# Altium PCB FPGA.PcbDoc (part 1 of 2)
Units mil, origin at the board's own origin, x right, y up, seen from the top; angles counter-clockwise.
Board outline 4158 x 2670 mil, 4 copper layers (Top Layer, Middle 1 Layer, Middle 2 Layer, Bottom Layer), stack 51.864 mil thick; 135 components, 122 nets, 386 pads, 107 vias.
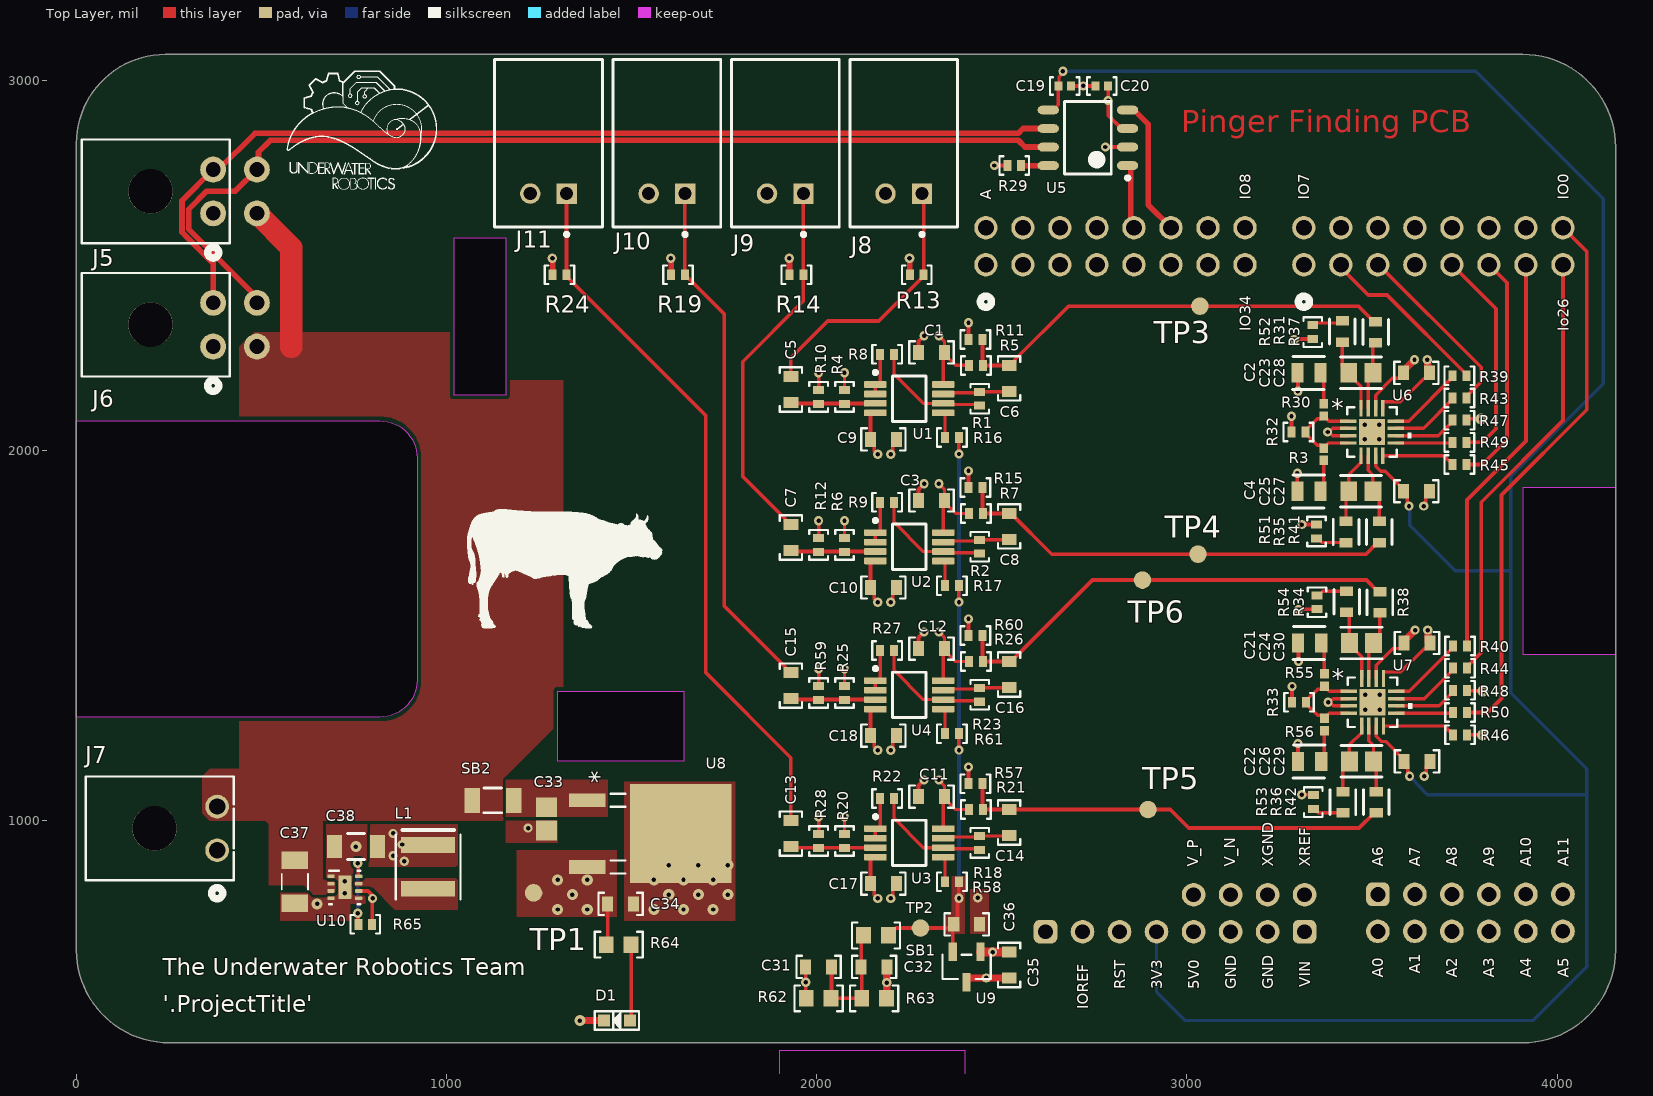
[diagram p0: Top Layer view]
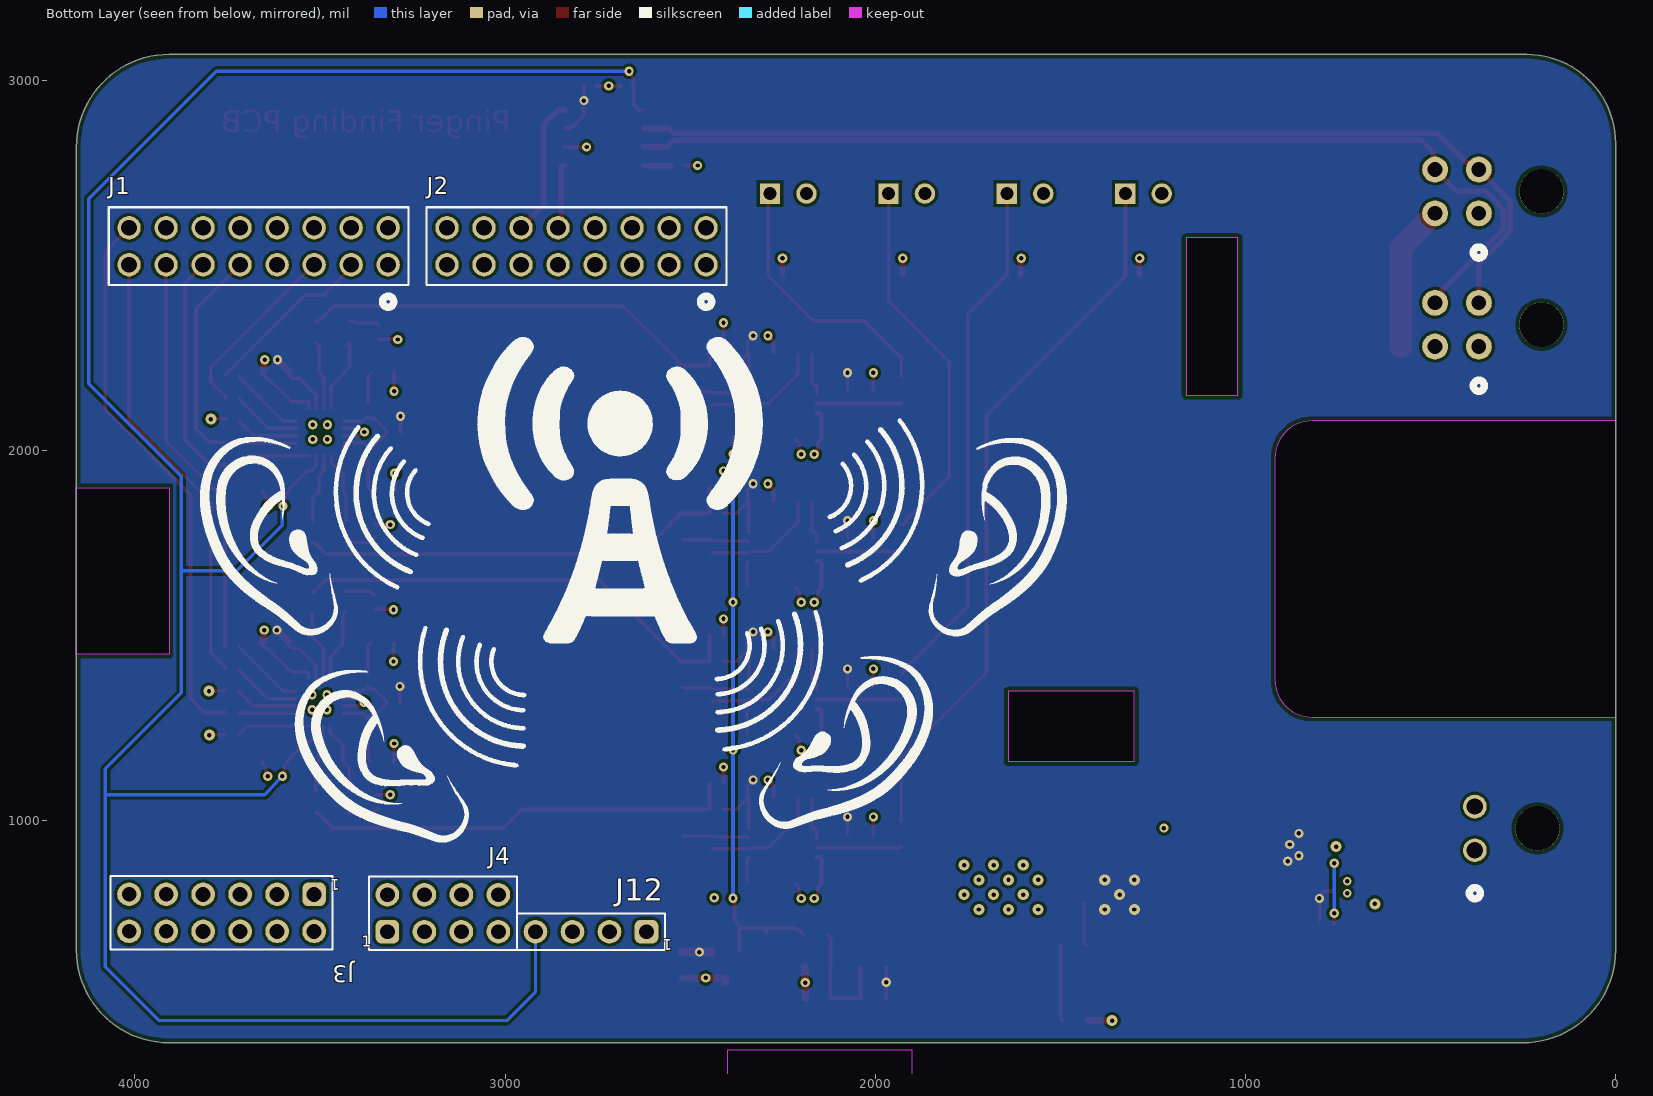
[diagram p1: Bottom Layer view, seen from below]
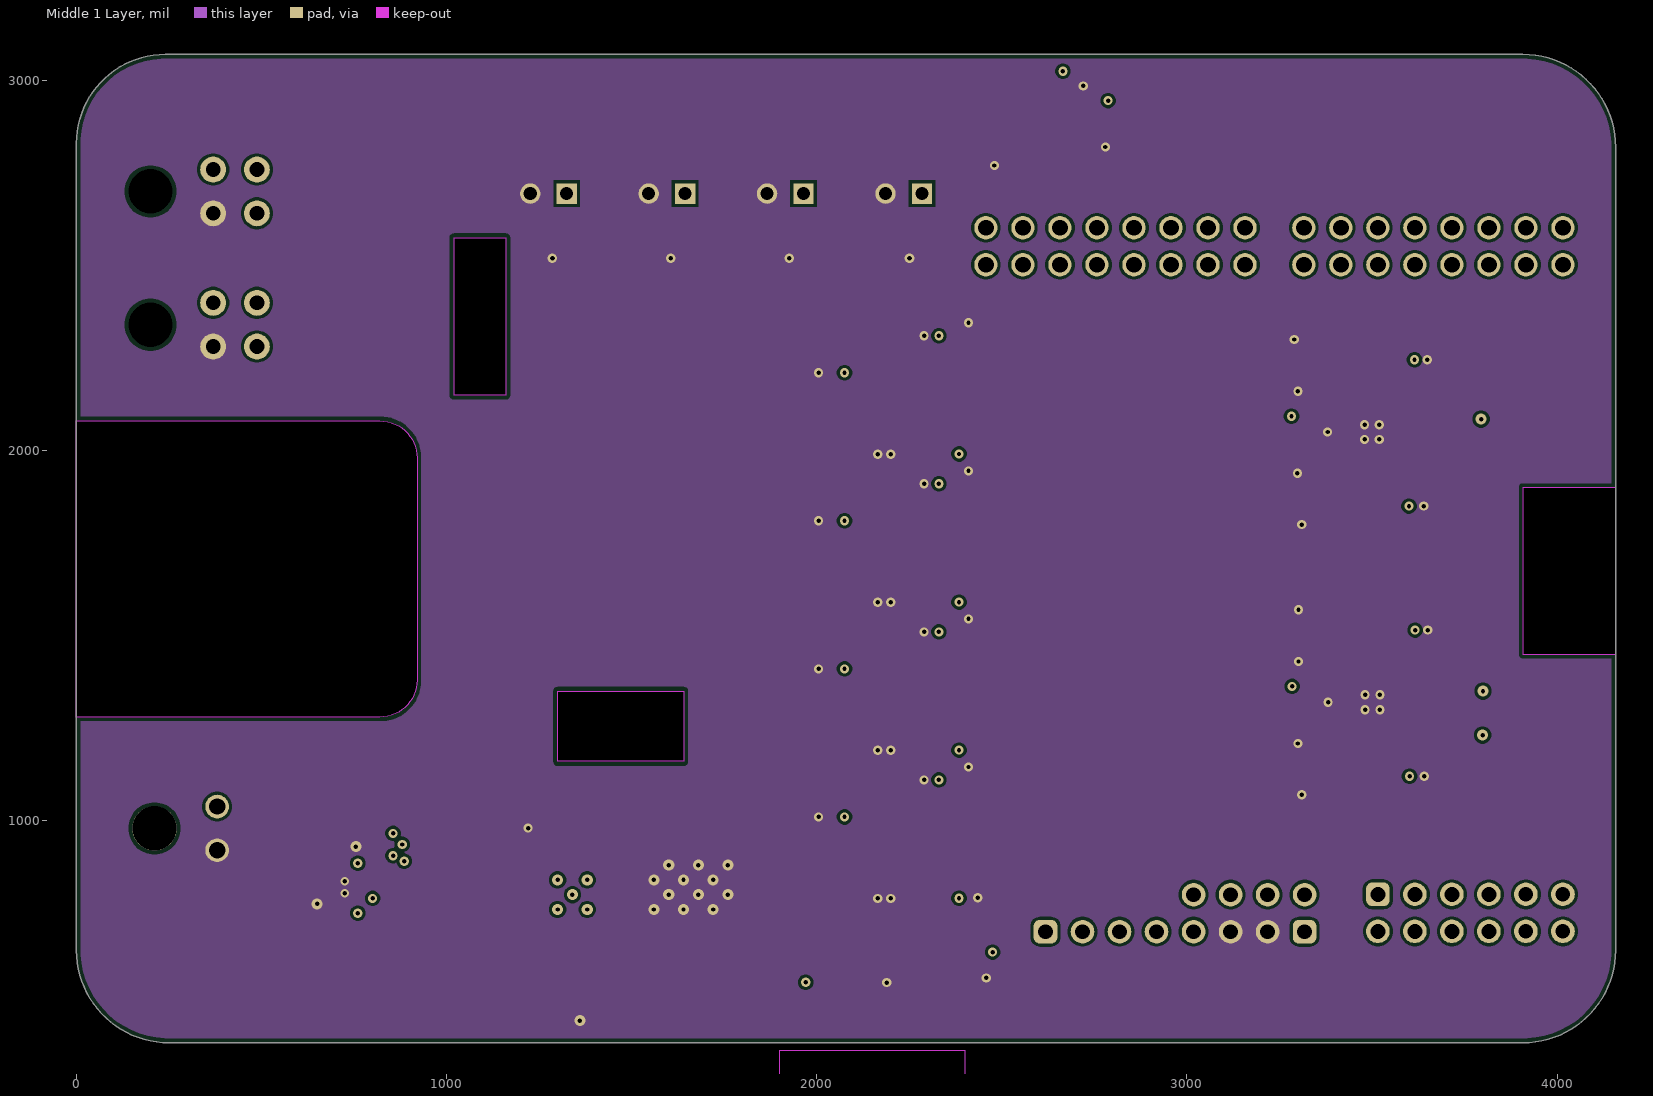
[diagram p2: Middle 1 Layer]
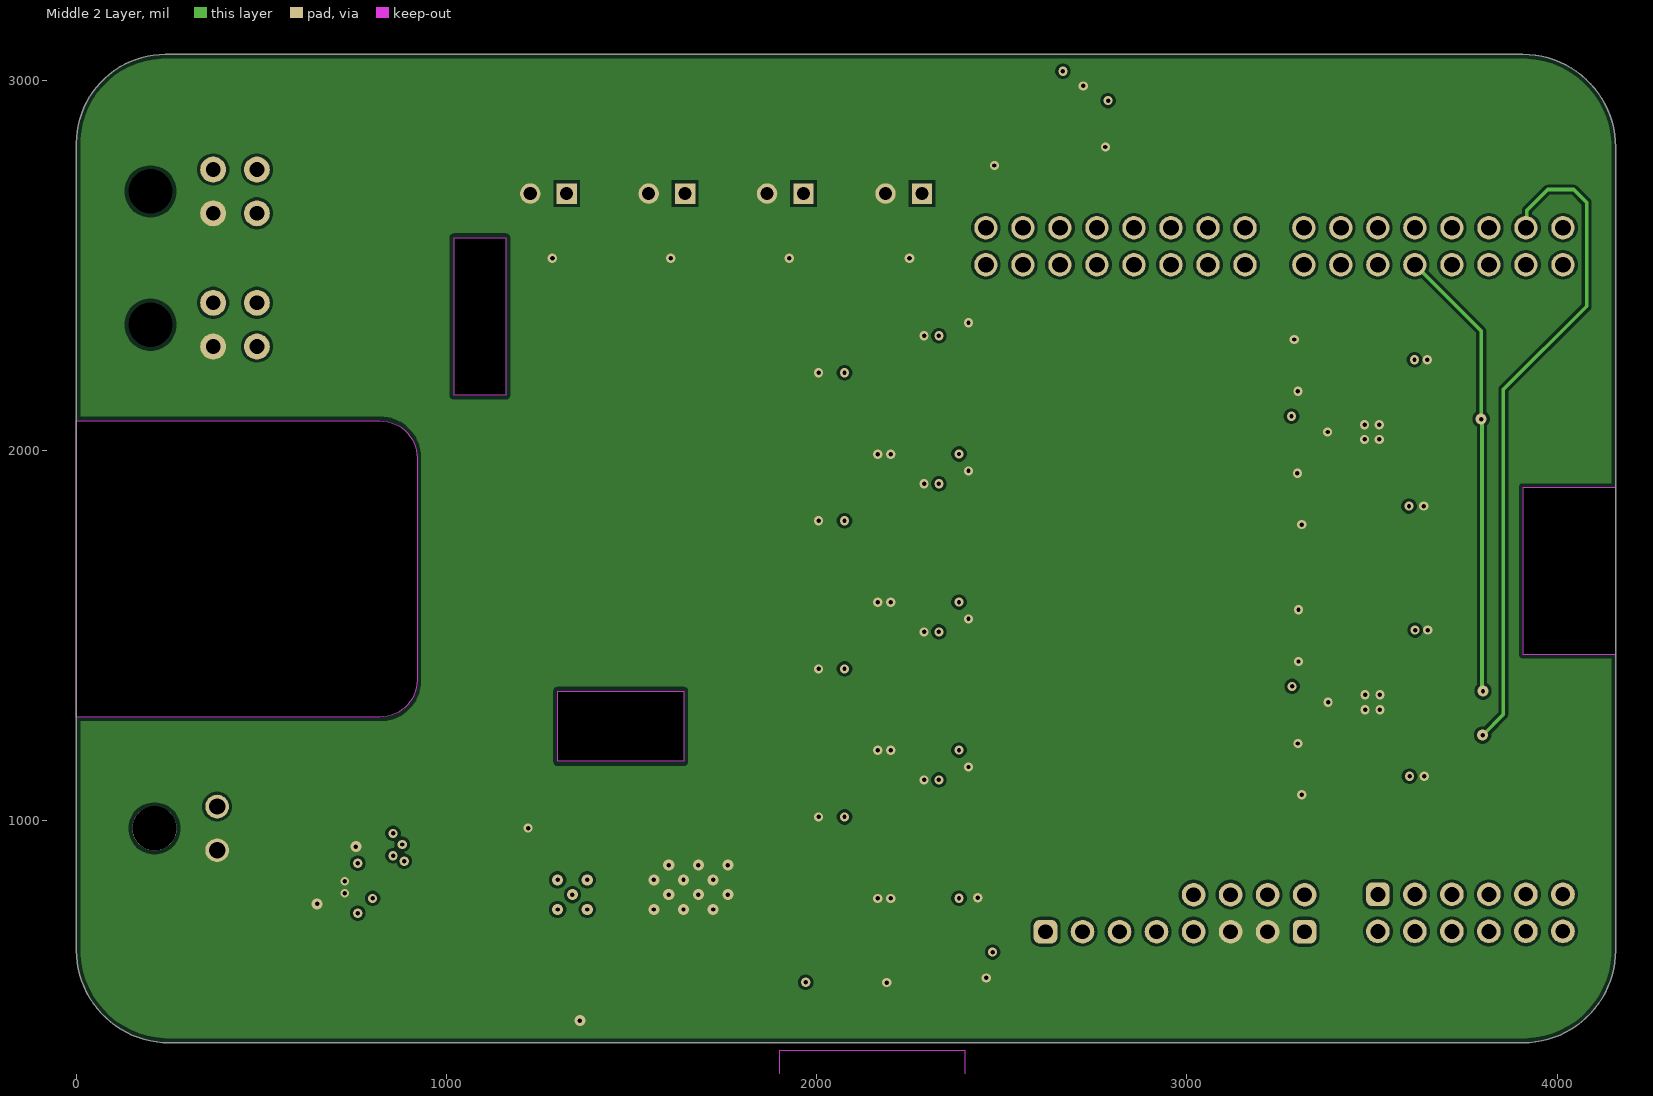
[diagram p3: Middle 2 Layer]
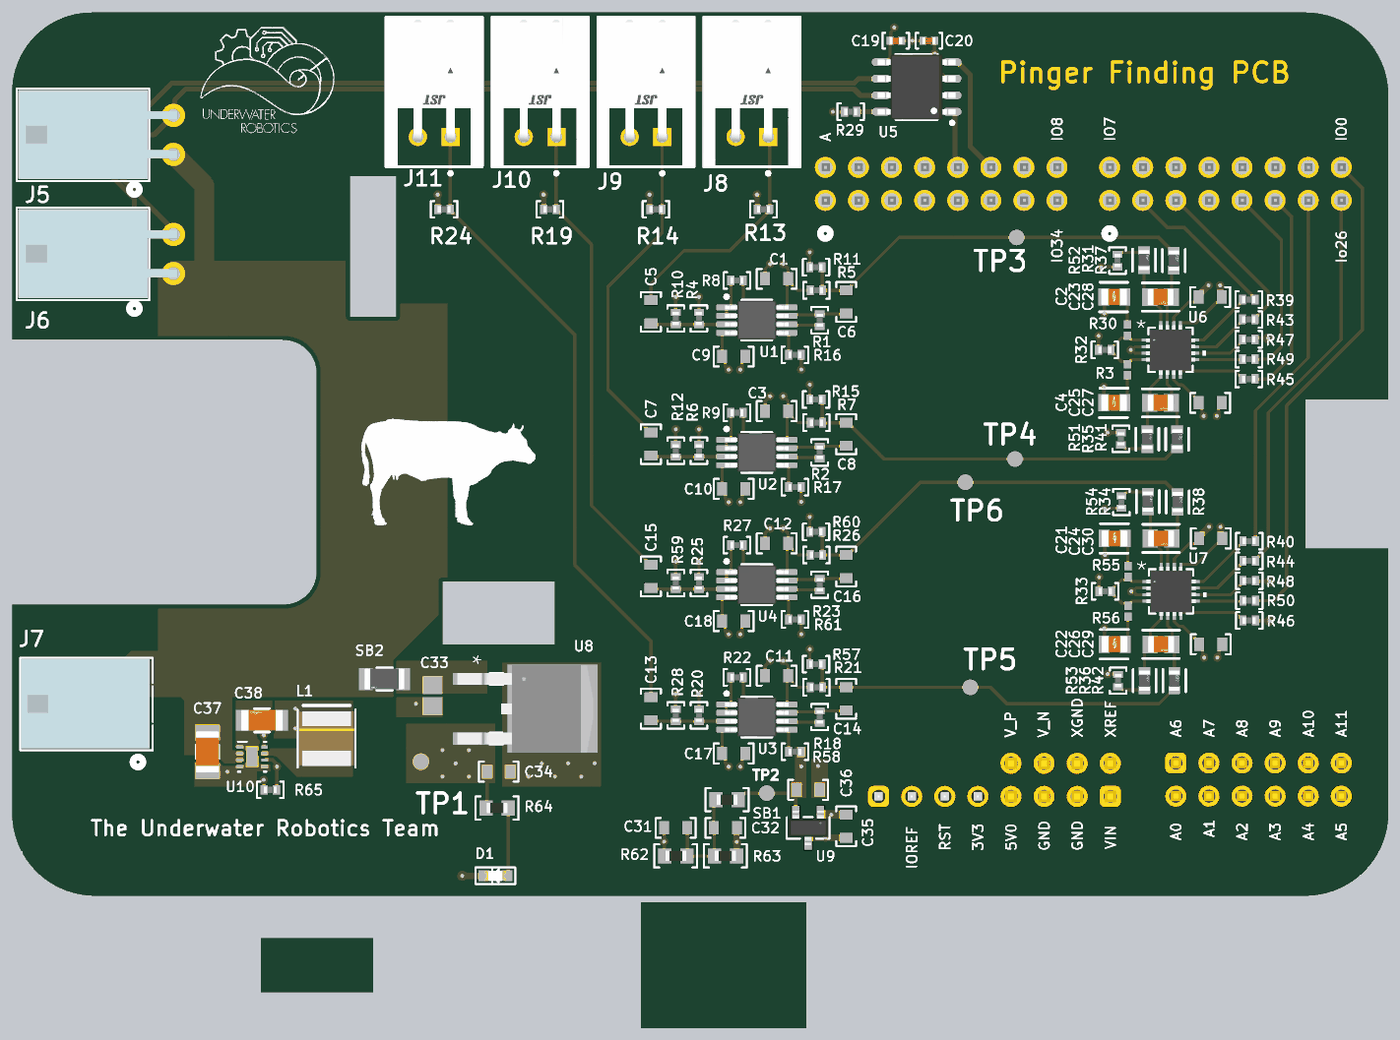
[diagram p4: 3D render of the assembled board from above, using the file's embedded part models]
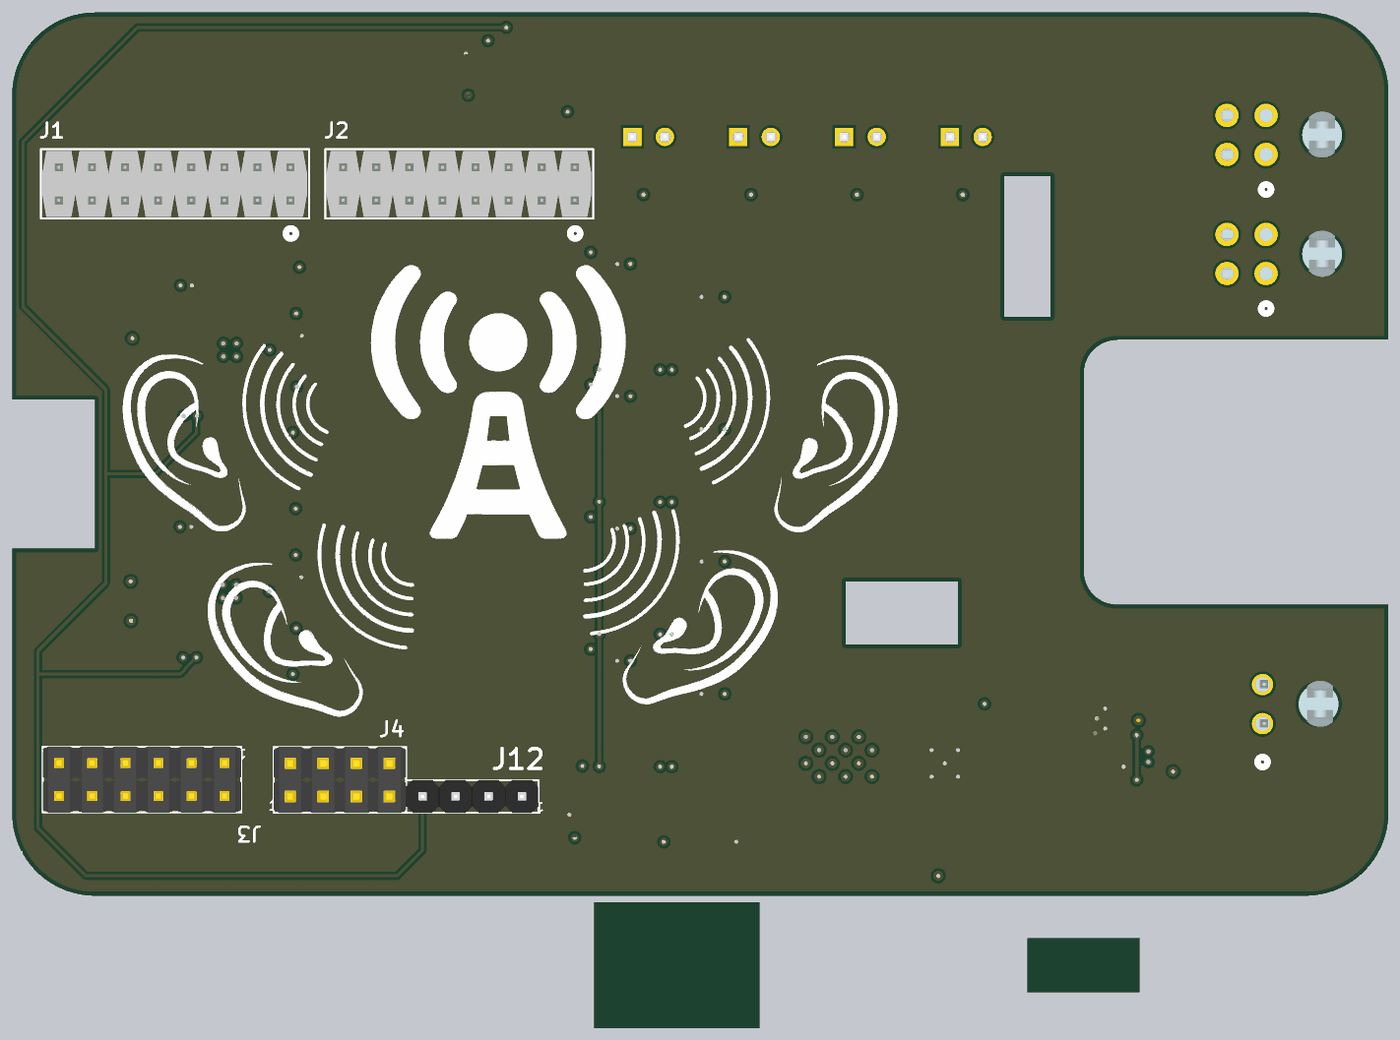
[diagram p5: 3D render of the assembled board from below, using the file's embedded part models]

## Layer stack, top to bottom
Top Solder: solder mask 1, SM-001, Dk 4
Top Layer: signal copper 1.378
Dielectric 1: prepreg 5.1, PP-017, Dk 4.3
Dielectric 2: prepreg 5.1, PP-017, Dk 4.3
Middle 1 Layer: signal copper 0.354
Dielectric 3: core 28, Core-039, Dk 4.8
Middle 2 Layer: signal copper 0.354
Dielectric 4: prepreg 5.1, PP-017, Dk 4.3
Dielectric 5: prepreg 5.1, PP-017, Dk 4.3
Bottom Layer: signal copper 1.378
Bottom Solder: solder mask 1, SM-001, Dk 4

## Board outline
3908,3070 cw(c3908,2820) 4158,2820 4158,650 cw(c3908,650) 3908,400 250,400 cw(c250,650) 0,650 0,2830 cw(c240,2830) 240,3070
cut-out: 920,1380 cw(c820,1380) 820,1280 0,1280 0,2080 820,2080 cw(c820,1980) 920,1980
cut-out: 1900,380 2400,380 2400,0 1900,0
cut-out: 1020,2150 1020,2575 1160,2575 1160,2150
cut-out: 1300,1350 1640,1350 1640,1160 1300,1160
cut-out: 752,271 1090,271 1090,108 752,108
cut-out: 4158,1900 3908,1900 3908,1450 4158,1450

## Design rules (kind name [scope] priority, off if disabled: settings)
AcuteAngle [All] p1: minimum=8.00000000000000E+0001 checktracksonly=FALSE
BoardOutlineClearance "BoardOutlineClearance JLCPCB" [All] p1: gap=11.81 ignorepadtopadclearanceinfootprint=FALSE
Clearance "Clearance JLCPCB 4 layer" [All] p1: gap=7.87 ignorepadtopadclearanceinfootprint=FALSE except(3.54: Arc-Arc Arc-Track Track-Track; 5: Arc-SMDPad Arc-Via Track-SMDPad Track-Via SMDPad-SMDPad; 9.45: THPad-THPad THPad-Via Via-Via; 10: Arc-Hole Track-Hole SMDPad-Hole THPad-Hole Via-Hole Fill-Hole Poly-Hole Region-Hole Text-Hole)
DiffPairsRouting "Diff Pairs USB 2.0" [InDifferentialPairClass('USB 2.0')] p1: maxlimit=5 minlimit=5 mostfreqgap=5 toplayer_minwidth=7.87 toplayer_maxwidth=7.87 toplayer_prefwidth=7.87 midlayer1_minwidth=15 midlayer1_maxwidth=15 midlayer1_prefwidth=15 midlayer2_minwidth=15 midlayer2_maxwidth=15 midlayer2_prefwidth=15 bottomlayer_minwidth=7.87 bottomlayer_maxwidth=7.87 bottomlayer_prefwidth=7.87 impedanceprofiledriven=TRUE impedanceprofileid={9C1C01C3-81FD-4AE1-9E3D-BC841176F5CA} maxuncoupledlength=500
DiffPairsRouting "Diff Pairs PCIe Gen 2" [InDifferentialPairClass('PCIe Gen 2')] p2: maxlimit=5 minlimit=5 mostfreqgap=5 toplayer_minwidth=5.53 toplayer_maxwidth=5.53 toplayer_prefwidth=5.53 midlayer1_minwidth=15 midlayer1_maxwidth=15 midlayer1_prefwidth=15 midlayer2_minwidth=15 midlayer2_maxwidth=15 midlayer2_prefwidth=15 bottomlayer_minwidth=5.53 bottomlayer_maxwidth=5.53 bottomlayer_prefwidth=5.53 impedanceprofiledriven=TRUE impedanceprofileid={D86E5A41-F98B-413D-93FD-A6E48D035561} maxuncoupledlength=500
HoleSize "HoleSize JLCPCB Pad" [IsPad] p1: absolutevalues=TRUE maxlimit=248.03 minlimit=19.68 maxpercent=80.000 minpercent=20.000
HoleSize "HoleSize JLCPCB 4 layer Cheap" [All] p2: absolutevalues=TRUE maxlimit=248.03 minlimit=11.81 maxpercent=80.000 minpercent=20.000
HoleToHoleClearance "HoleToHoleClearance JLCPCB Same Net" [All] p1: gap=10 allowstackedmicrovias=TRUE
MinimumAnnularRing "MinimumAnnularRing JLCPCB Via" [All] p1: minimumring=2.95
MinimumAnnularRing "MinimumAnnularRing JLCPCB Pad" [IsPad] p2: minimumring=9.84
MinimumAnnularRing "MinimumAnnularRing JLCPCB 1oz" [All] p3: minimumring=5.12
MinimumSolderMaskSliver "MinimumSolderMaskSliver JLCPCB" [All] p1: minsoldermaskwidth=3.94
PlaneClearance [All] p1: clearance=11.81
PlaneConnect [All] p1: planeconnectstyle=Direct reliefexpansion=20 reliefentries=4 reliefconductorwidth=10 reliefairgap=10
PolygonConnect [All] p1: connectstyle=Direct reliefconductorwidth=15 reliefentries=4 polygonreliefangle="45 Angle" airgapwidth=10
RoutingVias "RoutingVias JLCPCB 4 layer" [All] p1 off: holewidth=14 width=22 viastyle="Through Hole" minholewidth=11.81 minwidth=17.72 maxholewidth=50 maxwidth=80
SilkToSilkClearance [All] p1: silktosilkclearance=3
SilkToSolderMaskClearance "SilkToSolderMaskClearance JLCPCB" [IsPad] p1: minsilkscreentomaskgap=5.91 clearancetoexposedcopper=TRUE
SolderMaskExpansion "SolderMaskExpansion JLCPCB" [All] p1: expansion=1.5 istentingtop=FALSE
SupplyNets "Schematic Supply Nets" [InNet('+2.5')] p1: voltage=0.000
SupplyNets "Schematic Supply Nets_1" [InNet('+5')] p2: voltage=0.000
SupplyNets "Schematic Supply Nets_6" [InNet('GND')] p3: voltage=0.000
SupplyNets "Schematic Supply Nets_3" [InNet('12V')] p4: voltage=0.000
SupplyNets "Schematic Supply Nets_2" [InNet('3V3')] p5: voltage=0.000
UnRoutedNet [All] p1: checkbadconnections=TRUE
Width "Width JLCPCB 4 layer" [All] p1: maxlimit=196.85 minlimit=3.54 preferedwidth=9.84 minimp=50.000000 maximp=50.000000 favimp=50.000000
21 further rules are at their usual default settings.

## Classes and differential pairs
component class Connectors: C19 C20 C31 C32 C33 C34 C35 C36 C37 C38 D1 J1 J2 J3 J4 J5 J6 J7 J8 J9 J10 J11 J12 L1 R13 R14 R19 R24 R29 R62 R63 R64 R65 SB1 SB2 TP1 TP2 U5 U8 U9 U10
component class Filters: C1 C2 C3 C4 C5 C6 C7 C8 C9 C10 C11 C12 C13 C14 C15 C16 C17 C18 C21 C22 C23 C24 C25 C26 C27 C28 C29 C30 R1 R2 R3 R4 R5 R6 R7 R8 R9 R10 R11 R12 R15 R16 R17 R18 R20 R21 R22 R23 R25 R26 R27 R28 R30 R31 R32 R33 R34 R35 R36 R37 R38 R39 R40 R41 R42 R43 R44 R45 R46 R47 R48 R49 R50 R51 R52 R53 R54 R55 R56 R57 R58 R59 R60 R61 TP3 TP4 TP5 TP6 U1 U2 U3 U4 U6 U7
differential pair CAN: +CAN_P -CAN_N

## Components (designator, comment, footprint, x,y, rotation, side; value= is the part's Value field where it differs from the comment)
C1 "100nF Ceramic 25V" CAPACITOR_0603 2310,2265 r180 top value=0.1uF
C2 "CL21B106KOQNNNE" FP-CL21B106KOQNNNE-MFG 3330,2210 r0 top value=10uF
C3 "100nF Ceramic 25V" CAPACITOR_0603 2310,1865 r180 top value=0.1uF
C4 "CL21B106KOQNNNE" FP-CL21B106KOQNNNE-MFG 3330,1890 r0 top value=10uF
C5 "1uF Ceramic 16V" CAPACITOR_0603 1930,2165 r90 top value=1uF
C6 "1uF Ceramic 16V" CAPACITOR_0603 2520,2195 r270 top value=1uF
C7 "1uF Ceramic 16V" CAPACITOR_0603 1930,1765 r90 top value=1uF
C8 "1uF Ceramic 16V" CAPACITOR_0603 2520,1795 r270 top value=1uF
C9 "100nF Ceramic 25V" CAPACITOR_0603 2180,2030 r0 top value=0.1uF
C10 "100nF Ceramic 25V" CAPACITOR_0603 2180,1630 r0 top value=0.1uF
C11 "100nF Ceramic 25V" CAPACITOR_0603 2310,1065 r180 top value=0.1uF
C12 "100nF Ceramic 25V" CAPACITOR_0603 2310,1465 r180 top value=0.1uF
C13 "1uF Ceramic 16V" CAPACITOR_0603 1930,965 r90 top value=1uF
C14 "1uF Ceramic 16V" CAPACITOR_0603 2520,995 r270 top value=1uF
C15 "1uF Ceramic 16V" CAPACITOR_0603 1930,1365 r90 top value=1uF
C16 "1uF Ceramic 16V" CAPACITOR_0603 2520,1395 r270 top value=1uF
C17 "100nF Ceramic 25V" CAPACITOR_0603 2180,830 r0 top value=0.1uF
C18 "100nF Ceramic 25V" CAPACITOR_0603 2180,1230 r0 top value=0.1uF
C19 "100nF Ceramic 25V" CAPACITOR_0402 2670,2985 r0 top value=0.1uF
C20 "100nF Ceramic 25V" CAPACITOR_0402 2770,2985 r180 top value=0.1uF
C21 "CL21B106KOQNNNE" FP-CL21B106KOQNNNE-MFG 3331.5,1480 r0 top value=10uF
C22 "CL21B106KOQNNNE" FP-CL21B106KOQNNNE-MFG 3331.5,1160 r0 top value=10uF
C23 "GRM2195C1H103JA01D" FP-GRM219-0_1-IPC_B 3470,2210 r0 top
C24 "GRM2195C1H103JA01D" FP-GRM219-0_1-IPC_B 3471.5,1480 r0 top
C25 "GRM2195C1H103JA01D" FP-GRM219-0_1-IPC_B 3470,1890 r0 top
C26 "GRM2195C1H103JA01D" FP-GRM219-0_1-IPC_B 3471.5,1160 r0 top
C27 "10uF Ceramic 6.3V" CAPACITOR_0603 3620,1890 r180 top
C28 "10uF Ceramic 6.3V" CAPACITOR_0603 3620,2210 r180 top
C29 "10uF Ceramic 6.3V" CAPACITOR_0603 3621.5,1160 r180 top
C30 "10uF Ceramic 6.3V" CAPACITOR_0603 3621.5,1480 r180 top
C31 "100nF Ceramic 6.3V" CAPACITOR_0603 2005,605 r0 top value=0.1uF
C32 "100nF Ceramic 6.3V" CAPACITOR_0603 2155,605 r0 top value=0.1uF
C33 "TAJR334K020RNJ" CAPC2113X120X50NL20T30 1270,1005 r90 top
C34 "10uF Ceramic 6.3V" CAPACITOR_0603 1470,775 r0 top
C35 "100nF Ceramic 25V" CAPACITOR_0603 2520,610 r270 top value=0.1uF
C36 "1uF Ceramic 16V" CAPACITOR_0603 2405,720 r0 top value=1uF
C37 "10uF Ceramic 25V" CAPACITOR_1206 590,835 r270 top
C38 "GRM31CR71A226KE15L" FP-GRM31C-0_2-e0_3_0_8-MFG 755,930 r180 top
D1 "150060GS75000" LED_0603 1460,460 r180 top
J1 "HEADER DUAL VERT 2.54MM" HEADER_2x8PIN_2.54mm 3316,2502 r0 bottom locked
J2 "HEADER DUAL VERT 2.54MM" HEADER_2x8PIN_2.54mm 2457,2502 r0 bottom locked
J3 "HEADER DUAL VERT 2.54MM" HEADER_2x6PIN_2.54mm 3516,801 r0 bottom
J4 "HEADER DUAL VERT 2.54MM" HEADER_2x4PIN_2.54mm 3318,700 r180 bottom
J5 "Microfit+ R/A" "CONN_MOLEX_MICROFIT+_4_POS_R/A - duplicate" 369.29,2640.95 r270 top
J6 "Microfit+ R/A" "CONN_MOLEX_MICROFIT+_4_POS_R/A - duplicate" 369.29,2280.95 r270 top
J7 "Microfit+ R/A" CONN_MOLEX_MICROFIT+_2Flat_POS_R/A 380,920 r270 top
J8 "S2B-XH-A-GU" FP-S2B-XH-A-GU-MFG 2235,2830 r180 top
J9 "S2B-XH-A-GU" FP-S2B-XH-A-GU-MFG 1915,2830 r180 top
J10 "S2B-XH-A-GU" FP-S2B-XH-A-GU-MFG 1595,2830 r180 top
J11 "S2B-XH-A-GU" FP-S2B-XH-A-GU-MFG 1275,2830 r180 top
J12 "HEADER VERT 2.54MM" HEADER_4PIN_2.54MM 2618,700 r0 bottom
L1 "2.2uH Shielded" PA4332.222NLT 950,875 r270 top value=2.2uH
R1 "100k Ohm 1% 1/16W" RESISTOR_0402 2440,2140 r90 top
R2 "100k Ohm 1% 1/16W" RESISTOR_0402 2440,1740 r90 top
R3 "100m" RESC1005X40X25NL10T10 3370,1990 r270 top
R4 "1M Ohm 1% 1/16W" RESISTOR_0402 2075,2145 r270 top
R5 "1M Ohm 1% 1/16W" RESISTOR_0402 2430,2230 r0 top
R6 "1M Ohm 1% 1/16W" RESISTOR_0402 2075,1745 r270 top
R7 "1M Ohm 1% 1/16W" RESISTOR_0402 2430,1830 r0 top
R8 "10k Ohm 1% 1/16W" RESISTOR_0402 2190,2260 r180 top
R9 "10k Ohm 1% 1/16W" RESISTOR_0402 2190,1860 r180 top
R10 "1M Ohm 1% 1/16W" RESISTOR_0402 2005,2145 r90 top
R11 "1M Ohm 1% 1/16W" RESISTOR_0402 2428.7,2300 r180 top
R12 "1M Ohm 1% 1/16W" RESISTOR_0402 2005,1745 r90 top
R13 "1k Ohm 1% 1/16W" RESISTOR_0402 2270,2475 r180 top
R14 "1k Ohm 1% 1/16W" RESISTOR_0402 1945,2475 r180 top
R15 "1M Ohm 1% 1/16W" RESISTOR_0402 2428.7,1900 r180 top
R16 "0 Ohm 1% 1/16W" RESISTOR_0402 2365,2035 r0 top
R17 "0 Ohm 1% 1/16W" RESISTOR_0402 2365,1635 r0 top
R18 "100k Ohm 1% 1/16W" RESISTOR_0402 2440,940 r90 top
R19 "1k Ohm 1% 1/16W" RESISTOR_0402 1625,2475 r180 top
R20 "1M Ohm 1% 1/16W" RESISTOR_0402 2075,945 r270 top
R21 "1M Ohm 1% 1/16W" RESISTOR_0402 2430,1030 r0 top
R22 "10k Ohm 1% 1/16W" RESISTOR_0402 2190,1060 r180 top
R23 "100k Ohm 1% 1/16W" RESISTOR_0402 2440,1340 r90 top
R24 "1k Ohm 1% 1/16W" RESISTOR_0402 1305,2475 r180 top
R25 "1M Ohm 1% 1/16W" RESISTOR_0402 2075,1345 r270 top
R26 "1M Ohm 1% 1/16W" RESISTOR_0402 2430,1430 r0 top
R27 "10k Ohm 1% 1/16W" RESISTOR_0402 2190,1460 r180 top
R28 "1M Ohm 1% 1/16W" RESISTOR_0402 2005,945 r90 top
R29 "10k Ohm 1% 1/16W" RESISTOR_0402 2533.7,2770 r180 top
R30 "100m" RESC1005X40X25NL10T10 3370,2110 r90 top
R31 "RMCF0603FT10R0" FP-RMCF0603-MFG 3420,2321.46 r90 top
R32 "0 Ohm 1% 1/16W" RESISTOR_0402 3301.3,2050 r0 top
R33 "0 Ohm 1% 1/16W" RESISTOR_0402 3302.8,1320 r0 top
R34 "RMCF0603FT10R0" FP-RMCF0603-MFG 3431.5,1591.46 r90 top
R35 "RMCF0603FT10R0" FP-RMCF0603-MFG 3430,1780 r90 top
R36 "RMCF0603FT10R0" FP-RMCF0603-MFG 3421.5,1050 r90 top
R37 "RMCF0603FT10R0" FP-RMCF0603-MFG 3510,2320 r90 top
R38 "RMCF0603FT10R0" FP-RMCF0603-MFG 3521.5,1590 r90 top
R39 "0 Ohm 1% 1/16W" RESISTOR_0402 3736.3,2202 r180 top
R40 "0 Ohm 1% 1/16W" RESISTOR_0402 3737.8,1472 r180 top
R41 "RMCF0603FT10R0" FP-RMCF0603-MFG 3520,1780 r90 top
R42 "RMCF0603FT10R0" FP-RMCF0603-MFG 3511.5,1050 r90 top
R43 "0 Ohm 1% 1/16W" RESISTOR_0402 3736.3,2142 r180 top
R44 "0 Ohm 1% 1/16W" RESISTOR_0402 3737.8,1412 r180 top
R45 "0 Ohm 1% 1/16W" RESISTOR_0402 3736.3,1962 r0 top
R46 "0 Ohm 1% 1/16W" RESISTOR_0402 3737.8,1232 r0 top
R47 "0 Ohm 1% 1/16W" RESISTOR_0402 3736.3,2082 r180 top
R48 "0 Ohm 1% 1/16W" RESISTOR_0402 3737.8,1352 r180 top
R49 "0 Ohm 1% 1/16W" RESISTOR_0402 3736.3,2022 r180 top
R50 "0 Ohm 1% 1/16W" RESISTOR_0402 3737.8,1292 r180 top
R51 "0 Ohm 1% 1/16W" RESISTOR_0402 3350,1781.3 r90 top
R52 "0 Ohm 1% 1/16W" RESISTOR_0402 3340,2320 r270 top
R53 "0 Ohm 1% 1/16W" RESISTOR_0402 3341.5,1050 r90 top
R54 "0 Ohm 1% 1/16W" RESISTOR_0402 3351.5,1590 r270 top
R55 "100m" RESC1005X40X25NL10T10 3371.5,1380 r90 top
R56 "100m" RESC1005X40X25NL10T10 3371.5,1260 r270 top
R57 "1M Ohm 1% 1/16W" RESISTOR_0402 2428.7,1100 r180 top
R58 "0 Ohm 1% 1/16W" RESISTOR_0402 2365,835 r0 top
R59 "1M Ohm 1% 1/16W" RESISTOR_0402 2005,1345 r90 top
R60 "1M Ohm 1% 1/16W" RESISTOR_0402 2428.7,1500 r180 top
R61 "0 Ohm 1% 1/16W" RESISTOR_0402 2365,1235 r0 top
R62 "100k Ohm 0.5% 1/10W" RESISTOR_0603 2005,520 r0 top
R63 "100k Ohm 0.5% 1/10W" RESISTOR_0603 2155,520 r0 top
R64 "10k Ohm 5% 1/10W" RESISTOR_0603 1465,665 r0 top
R65 "100k Ohm 1% 1/16W" RESISTOR_0402 780,720 r180 top
SB1 "0 Ohm Jumper No Fit" RESISTOR_0603 2160,690 r180 top
SB2 "JUMPER_0_1206" RESISTOR_1206 1125,1055 r180 top value=0
TP1 "PCB Test Point" TESTPOINT_1.2MM 1235,805 r90 top
TP2 "PCB Test Point" TESTPOINT_1.2MM 2280,710 r90 top
TP3 "PCB Test Point" TESTPOINT_1.2MM 3035,2390 r90 top
TP4 "PCB Test Point" TESTPOINT_1.2MM 3030,1720 r90 top
TP5 "PCB Test Point" TESTPOINT_1.2MM 2895,1030 r90 top
TP6 "PCB Test Point" TESTPOINT_1.2MM 2880,1650 r90 top
U1 "OPA2354AIDGKR" DGK0008A_M 2250,2140 r0 top
U2 "OPA2354AIDGKR" DGK0008A_M 2250,1740 r0 top
U3 "OPA2354AIDGKR" DGK0008A_M 2250,940 r0 top
U4 "OPA2354AIDGKR" DGK0008A_M 2250,1340 r0 top
U5 "CAN Transceiver" SOIC-8 2732.72,2845 r180 top
U6 "ADS7253IRTET" WQFN-16 3500,2050 r0 top
U7 "ADS7253IRTET" WQFN-16 3501.5,1320 r0 top
U8 "MC7805BDTRKG" DPAK-2 1632.5,965.16 r270 top
U9 "MAX6102EUR+T" SOT-23-3 2405,605 r180 top
U10 "TPS62163DSGR" DSG0008A_V 725,820 r0 top

## Footprints (in the part's own frame and the unit in brackets; to place one, negate y for a bottom-side part, rotate by r counter-clockwise, add the part's x,y. Pads: shape width x height; smd on the part's side, far side on the other; paste and mask are expansions set on the pad)
CAPACITOR_0402 [mm]
  rect 0.56x0.6 smd: 1(-0.435,0) 2(0.435,0)
  silkscreen extent -1.02,-0.6 1.02,0.6, body extent -0.5,-0.28 0.5,0.27, height 0.51
CAPACITOR_0603 [mil] "CAPACITOR 0603"
  rect 30x40 smd: 1(-35,0) 2(35,0)
  silkscreen extent -60,-30 60,30, body extent -31,-16 32,16, height 31
CAPACITOR_1206 [mm]
  rect 1.2x1.82 smd: 1(-1.46,0) 2(1.46,0)
  silkscreen extent -0.54,-0.9 0.54,0.9, body extent -1.6,-0.9 1.6,0.9, height 1.61
CAPC2113X120X50NL20T30 [mm] "Chip Capacitor, 2-Leads, Body 2.05x1.25mm, IPC Medium Density"
  rect 1.35x1.45 smd: 1(-0.8,0) 2(0.8,0)
  body extent -1.13,-0.72 1.12,0.72, height 1.2
CONN_MOLEX_MICROFIT+_2Flat_POS_R/A [mil] "CONN HEADER R/A 2POS 3MM"
  round 64 hole 44 paste-99999 mask+0: 1(0,0) 2(-118.11,0)
  round 120 hole 120 unplated paste-99999 mask+0: 3(-59.06,-169.29)
  silkscreen extent -199,-355 131,45, body extent -195,-355 75,35, height 210
"CONN_MOLEX_MICROFIT+_4_POS_R/A - duplicate" [mil] "CONN HEADER R/A 4POS 3MM"
  round 70 hole 40 paste-99999 mask+0: 1(0,0) 2(-118.11,0) 3(0,118.11) 4(-118.11,118.11)
  round 120 / inner round 60 / far side round 120 hole 120 unplated paste-99999 mask-60: 5(-59.05,-169.29)
  silkscreen extent -199,-355 121,45, body extent -195,-351 75,131, height 325
DGK0008A_M [mm] "TSOP, 8-Leads, Body 3.1x3.1mm, Pitch 0.65mm, IPC Low Density"
  rrect22% 1.55x0.45 smd: 1(-2.325,0.975) 2(-2.325,0.325) 3(-2.325,-0.325) 4(-2.325,-0.975) 5(2.325,-0.975) 6(2.325,-0.325) 7(2.325,0.325) 8(2.325,0.975)
  silkscreen extent -2.45,-1.55 1.15,1.92, body extent -2.45,-1.5 2.45,1.5, height 0.94
DPAK-2 [mil]
  rect 36.97x97.56 smd paste+0 mask+0: 1(-90.16,-252.5) 3(90.16,-252.5)
  rect 267x273 smd paste+0 mask+0: 2(0,0)
  silkscreen extent -108,-190 108,-150, body extent -133,-288 133,123, height 67
DSG0008A_V [mm] "SON, 8-Leads, Body 2x2mm, Pitch 0.5mm, Thermal Pad 1.6x0.9mm, TI Recommended"
  rrect40% 0.5x0.25 smd: 1(-0.95,0.75) 2(-0.95,0.25) 3(-0.95,-0.25) 4(-0.95,-0.75) 5(0.95,-0.75) 6(0.95,-0.25) 7(0.95,0.25) 8(0.95,0.75)
  rrect11% 0.9x1.6 smd paste-0.45: 9(0,0)
  silkscreen extent -1.07,-1.15 1.07,1.15, body extent -1.05,-1.05 1.05,1.05, height 0.8
FP-CL21B106KOQNNNE-MFG [mm]
  rect 0.825x1.325 smd paste+0 mask+0: 1(-0.8,0) 2(0.8,0)
  silkscreen extent -1.13,-1.14 1.05,1.12, body extent -1.31,-0.8 1.31,0.8, height 0.25
FP-GRM31C-0_2-e0_3_0_8-MFG [mm]
  rect 1.05x1.6 smd paste+0 mask+0: 1(-1.475,0) 2(1.475,0)
  silkscreen extent -0.58,-0.9 0.58,0.9, body extent -2.1,-1 2.1,1, height 0.25
FP-GRM219-0_1-IPC_B [mil]
  rect 45.58x53.63 smd paste+0 mask+0: 1(-32.57,0) 2(32.57,0)
  silkscreen extent -55,-43 55,43, body extent -65,-37 65,37, height 10
FP-RMCF0603-MFG [mm]
  rect 0.65x0.9 smd paste+0 mask+0: 1(-0.725,0) 2(0.725,0)
  silkscreen extent -0.85,-0.88 0.85,0.88, body extent -1.15,-0.58 1.15,0.58, height 0.25
FP-S2B-XH-A-GU-MFG [mm]
  rect 1.4x1.4 hole 0.9 paste-2539.97 mask+0: 1(-1.25,3.45)
  round 1.4 hole 0.9 paste-2539.97 mask+0: 2(1.25,3.45)
  silkscreen extent -3.7,-5.75 3.7,6.37, body extent -3.8,-5.85 3.8,5.85, height 0.25
HEADER_2x4PIN_2.54mm [mm]
  rrect50% 1.62x1.62 hole 1.02: 1(0,0)
  round 1.62 hole 1.02: 2(0,2.54) 3(2.54,0) 4(2.54,2.54) 5(5.08,0) 6(5.08,2.54) 7(7.62,0) 8(7.62,2.54)
  silkscreen extent -1.27,-1.25 8.89,3.79, body extent -1.27,-1.27 8.89,3.81, height 8.38
HEADER_2x6PIN_2.54mm [mm]
  rrect50% 1.62x1.62 hole 1.02: 1(0,0)
  round 1.62 hole 1.02: 2(0,2.54) 3(2.54,0) 4(2.54,2.54) 5(5.08,0) 6(5.08,2.54) 7(7.62,0) 8(7.62,2.54)
  round 1.62 hole 1: 9(10.16,0) 10(10.16,2.54) 11(12.7,0) 12(12.7,2.54)
  silkscreen extent -1.27,-1.25 13.97,3.79, body extent -1.27,-1.27 13.97,3.81, height 8.51
HEADER_2x8PIN_2.54mm [mil]
  round 63 hole 43 paste-99999 mask+0: 1(0,0) 2(0,-100) 3(100,0) 4(100,-100) 5(200,0) 6(200,-100) 7(300,0) 8(300,-100) 9(400,0) 10(400,-100) 11(500,0) 12(500,-100) 13(600,0) 14(600,-100) 15(700,0) 16(700,-100)
  silkscreen extent -55,-155 755,115, body extent -49,-150 751,50, height 365
HEADER_4PIN_2.54MM [mm]
  rrect50% 1.62x1.62 hole 1.02: 1(0,0)
  round 1.62 hole 1.02: 2(2.54,0) 3(5.08,0) 4(7.62,0)
  silkscreen extent -1.27,-1.25 8.89,1.25, body extent -1.27,-1.27 8.89,1.27, height 10.48
LED_0603 [mil] "LED 0603"
  rect 32x32 smd: 1(-35,0) 2(35,0)
  silkscreen extent -60,-25 60,25, body extent -31,-16 32,16, height 28
PA4332.222NLT [mil]
  rect 43.1x146 smd paste+0 mask+0: 1(-58.95,0) 2(58.95,0)
  silkscreen extent -100,-88 88,88, body extent -83,-83 83,83, height 79
RESC1005X40X25NL10T10 [mm] "Chip Resistor, 2-Leads, Body 1.00x0.50mm, IPC Medium Density"
  rect 0.65x0.6 smd: 1(-0.425,0) 2(0.425,0)
  body extent -0.55,-0.3 0.55,0.3, height 0.4
RESISTOR_0402 [mm] "Resistor 0402"
  rect 0.55x0.75 smd: 1(-0.475,0) 2(0.475,0)
  silkscreen extent -1.02,-0.64 1.02,0.64, body extent -0.5,-0.25 0.5,0.25, height 0.25
RESISTOR_0603 [mil] "Resistor 0603"
  rect 40x45 smd: 1(-33.5,0) 2(33.5,0)
  silkscreen extent -65,-35 65,35, body extent -31,-16 32,16, height 16
RESISTOR_1206 [mil]
  rect 41.66x67.41 smd paste+0 mask+0: 1(-56.18,0) 2(56.18,0)
  silkscreen extent -24,-34 24,34, body extent -87,-44 87,44, height 10
SOIC-8 [mm] "SOIC, 8-Leads, Body 4.90x3.90mm, Pitch 1.27mm, IPC Medium Density"
  oval 1.45x0.6 smd: 1(-2.725,1.905) 2(-2.725,0.635) 3(-2.725,-0.635) 4(-2.725,-1.905) 5(2.725,-1.905) 6(2.725,-0.635) 7(2.725,0.635) 8(2.725,1.905)
  silkscreen extent -2.85,-2.5 1.6,2.88, body extent -3,-2.5 3,2.5, height 1.75
SOT-23-3 [mil]
  rect 22x50 smd paste+0 mask+4: 1(-37.5,-41) 2(37.5,-41) 3(0,41)
  silkscreen extent -65,-33 65,33, body extent -60,-52 60,52, height 44
TESTPOINT_1.2MM [mm]
  round 1.2 smd: TP(0,0)
WQFN-16 [mm]
  rect 1.155x0.229 smd paste+0 mask+0: 1(-1.627,0.75) 2(-1.627,0.25) 3(-1.627,-0.25) 4(-1.627,-0.75) 9(1.627,-0.75) 10(1.627,-0.25) 11(1.627,0.25) 12(1.627,0.75)
  rect 0.229x1.155 smd paste+0 mask+0: 5(-0.75,-1.627) 6(-0.25,-1.627) 7(0.25,-1.627) 8(0.75,-1.627) 13(0.75,1.627) 14(0.25,1.627) 15(-0.25,1.627) 16(-0.75,1.627)
  rect 1.8x1.8 smd paste+0 mask+0: 17(0,0)
  silkscreen extent -1.7,-1.7 2.71,1.7, body extent -1.9,-1.9 1.9,1.9, height 1.65

## Part data
C1 C3 C9 C10 C11 C12 C17 C18 C35: library part CAPACITOR_0.1uF_0603_25V, "Cap 100nF 25V +/-10% / Ceramic 0603", Supplier Part Number 1=1276-1006-1-ND, Tolerance="+/- 10%", Voltage=6.3V, ComponentLink1Description=Datsheet, ComponentLink1URL=https://www.mouser.com/datasheet/2/212/KEM_C1002_X7R_SMD-1102033.pdf, Made By="Flip B", Supplier 1=Digikey
C2 C4 C21 C22: library part CMP-2000-06106-2, "CAP CER 10UF 16V X7R 0805", Capacitance=10uF, Manufacturer="Samsung Electro-Mechanics America, Inc", Temperature="-55°C to +125°C", Temperature Characteristic=X7R, Temperature Coefficient=15%, Temperature Range High=+125°C, Temperature Range Low=-55°C, Tolerance=10%, Voltage Rating=16V, Automotive=No, Category=Cap, ComponentLink2Description=Datasheet, ComponentLink2URL=http://www.samsungsem.com/servlet/FileDownload?path=productsearch&sname=CL21B106KOQNNNE.pdf&oname=CL21B106KOQNNNE.pdf, Device Class L1="Passive Components", Device Class L2=Capacitors, Device Class L3="Ceramic Capacitors", Digikey Description="CAP CER 10UF 16V X7R 0805", Height=1.4mm, Ipc Land Pattern Name=CAPC200125X125, Lead Free=Yes, Manufacturer Part Number=CL21B106KOQNNNE, Material=Ceramic, Octopart=https://octopart.com/cl21b106koqnnne-samsung-19832289, Package=CL21B106KOQNNNE, RoHS=TRUE
C5 C6 C7 C8 C13 C14 C15 C16 C36: library part CAPACITOR_1uF_0603, "Cap 1uF 16V +/-10% / Ceramic 0603", Supplier Part Number 1=C1608X7R1C105K080AC, Tolerance="+/- 10%", Voltage=16V, Made By="Flip B", Supplier 1="Arrow Electronics"
C19 C20: library part CAPACITOR_0.1uF_0402, "Cap 100nF 25V +/-10% / Ceramic 0402", Supplier Part Number 1=478-7868-1-ND, Tolerance="+/- 10%", Voltage=25V, Made By="Robert Pafford", Supplier 1=Digi-Key
C23 C24 C25 C26: library part CMP-2007-00135-2, "Chip Multilayer Ceramic Capacitors for General Purpose, 0805, 10000pF, C0G, 30ppm/°C, 5%, 50V", Capacitance=10nF, Case Code (Imperial)=0805, Case Code (Metric)=2012, Dielectric=C0G, Dielectric Material=Ceramic, Insulation Resistance=10GR, Max Operating Temperature=125°C, Min Operating Temperature=-55°C, Package Quantity=1, Temperature Coefficient=30ppm/°C, Tolerance=5%, Voltage=50V, Case/Package=0805, Depth=1.25mm, Height=0.85mm, Lead Free="Lead Free", Length=2mm, Material=Ceramic, Mount="Surface Mount", Number of Pins=2, Packaging="Tape and Reel", Radiation Hardening=No, REACH SVHC="No SVHC", Termination=SMD/SMT, Thickness=0.037inch, Voltage Rating=50V, Voltage Rating (DC)=50V, Width=0.049inch
C27 C28 C29 C30 C34: library part CAPACITOR_10uF_0603, "Cap 10uF 6.3V +/-20% / Ceramic 0603", Supplier Part Number 1=1276-1119-1-ND, Tolerance="+/- 20%", Value (uF)="10 uF", Voltage=6.3V, ComponentLink1Description=Digikey, ComponentLink1URL=https://www.digikey.com/en/products/detail/samsung-electro-mechanics/CL10A106MQ8NNNC/3886777, Made By="Flip B", Supplier 1=Digi-Key
C31 C32: library part CAPACITOR_0.1uF_0603, "Cap 100nF 6.3V +/-10% / Ceramic 0603", Supplier Part Number 1=399-15351-1-ND, Tolerance="+/- 10%", Voltage=6.3V, ComponentLink1Description=Datsheet, ComponentLink1URL=https://www.mouser.com/datasheet/2/212/KEM_C1002_X7R_SMD-1102033.pdf, Made By="Flip B", Supplier 1=Digi-Key
C33: library part CMP-2007-04068-1, Manufacturer="AVX Interconnect / Elco", Part Number=TAJR334K020RNJ
C37: library part CAPACITOR_10uF_1206, "Cap 10uF 25V +/-10% / Ceramic 1206", Supplier Part Number 1=1276-1804-6-ND, Tolerance="+/- 10%", Value (uF)="10 uF", Voltage=25V, Made By="Robert Pafford", Supplier 1=Digi-Key
C38: library part CMP-06035-003841-1, "Chip Multilayer Ceramic Capacitors for General Purpose, 1206, 22uF, X7R, 15%, 10%, 10V", Capacitance=22uF, Case Code (Imperial)=1206, Case Code (Metric)=3216, Dielectric=X7R, Max Operating Temperature=125°C, Min Operating Temperature=-55°C, Package Quantity=1, Tolerance=10%, Voltage=10V, Case/Package=1206, Depth=1.6mm, Height=1.6mm, Lead Free="Lead Free", Length=3.2mm, Material=Ceramic, Mount="Surface Mount", Packaging="Tape and Reel", Radiation Hardening=No, REACH SVHC="No SVHC", Termination=SMD/SMT, Thickness=0.071inch, Voltage Rating=10V, Voltage Rating (DC)=10V, Width=0.063inch
D1: library part LED_Green_0603_3.2V, "LED Green Vf= 3.2V If = 0.025A / 150060GS75000", Color=Green, Forward Current=25mA, Forward Voltage=3.2V, Package=0603, Supplier Part Number 1=732-4971-1-ND, ComponentLink1Description=Datasheet, ComponentLink1URL=https://www.we-online.de/katalog/datasheet/150060GS75000.pdf, Made By="Flip B", Supplier 1=Digi-Key
J1 J2: library part HEADER_2x8PIN_2.54_1, "CONN HEADER VERT 8POS 2.54MM", Supplier Part Number 1=WM8144-ND, Created By="John Ulm", Pitch (mm)=2.54, Positions=16, Supplier 1=DigiKey
J3: library part HEADER_2x6PIN_2.54, "CONN HEADER VERT 6POS 2.54MM", Supplier Part Number 1=2057-PH2-12-UA-ND, Created By="John Ulm", Pitch (mm)=2.54, Positions=12, Supplier 1=DigiKey
J4: library part HEADER_2x4PIN_2.54_1, "CONN HEADER VERT 4POS 2.54MM", Supplier Part Number 1=PH2-08-UA, Created By="John Ulm", Pitch (mm)=2.54, Positions=8, Supplier 1="RS (Formerly Allied Electronics)"
J5 J6: library part CONN_MOLEX_MICROFIT+_4POS_R/A, "Molex Microfit+  / 212528 4 POS R/A Black", Color=Black, Current Per Pin=12.5A, Manufacturer=Molex, Supplier Part Number 1=900-2125280400-ND, Configuration=R/A, Pitch=3.0mm, Supplier 1=Digikey
J7: library part CONN_MOLEX_MICROFIT+_2POS_Flat_R/A, "Molex Microfit+  / 2157601002 2POS Right Angle", Color=Black, Current Per Pin=12.5A, Manufacturer=Molex, Supplier Part Number 1=900-2157601002-ND, Configuration=R/A, Pitch=3.0mm, Supplier 1=DigiKey
J8 J9 J10 J11: library part CMP-17439-000226-1, "Conn Shrouded Header HDR 2 POS 2.45mm Solder ST Top Entry Thru-Hole", Lead Free="Lead Free"
J12: library part HEADER_4PIN_2.54MM, "CONN HEADER VERT 4POS 2.54MM", Supplier Part Number 1=S1012E-04-ND, Made By="Robert Pafford", Supplier 1=Digi-Key
L1: library part INDUCTOR_2.2uH, "2.2 µH Shielded Drum Core, Wirewound Inductor 4.3 A 48mOhm Max Nonstandard", Supplier Part Number 1=553-3290-1-ND, Supplier 1=DigiKey
R1 R2 R18 R23 R65: library part RESISTOR_100K_0402, "RES 100k OHM 1% 1/16W 0402", Supplier Part Number 1=YAG3434CT-ND, Tolerance="+/- 1%", Value  (Ohms)=100K, Made By="Robert Pafford", Supplier 1=Digikey, Wattage=1/16W
R3 R30 R55 R56: library part CMP-2002-06400-1, Manufacturer=Yageo, Part Number=RL0402JR-070R1L
R4 R5 R6 R7 R10 R11 R12 R15 R20 R21 R25 R26 R28 R57 R59 R60: library part RESISTOR_1M_0402, "RES 1M OHM 1% 1/16W 0402", Supplier Part Number 1=YAG3450CT-ND, Tolerance="+/- 1%", Value  (Ohms)=1M, Made By="Robert Pafford", Supplier 1=Digikey, Wattage=1/16W
R8 R9 R22 R27 R29: library part RESISTOR_10K_0402, "RES 10k OHM 1% 1/16W 0402", Digikey Part Numer=CR0603-JW-104ELFTR-ND, Supplier Part Number 1=YAG3436CT-ND, Tolerance="+/- 1%", Value  (Ohms)=10K, Made By="Robert Pafford", Supplier=Digikey, Supplier 1=Digi-Key, Wattage=1/16W
R13 R14 R19 R24: library part RESISTOR_1K_0402, "RES 1k OHM 1% 1/16W 0402", Digikey Part Numer=CR0603-JW-104ELFTR-ND, Supplier Part Number 1=13-AC0402FR-131KLCT-ND, Tolerance="+/- 1%", Value  (Ohms)=1K, Made By="Robert Pafford", Supplier=Digikey, Supplier 1=Digi-Key, Wattage=1/16W
R16 R17 R32 R33 R39 R40 R43 R44 R45 R46 R47 R48 R49 R50 R51 R52 R53 R54 R58 R61: library part RESISTOR_0_0402, "RES 0 OHM 1% 1/16W 0402", Supplier Part Number 1=13-AC0402FR-070RLCT-ND, Tolerance="+/- 1%", Value  (Ohms)=0, Made By="Robert Pafford", Supplier 1=Digikey, Wattage=1/16W
R31 R34 R35 R36 R37 R38 R41 R42: library part CMP-26527-005040-1, "10Ω ±1% 0.1W 0603 Thick Film Chip Resistor AEC-Q200 compliant", Case Code (Imperial)=0603, Case Code (Metric)=1608, Max Operating Temperature=155°C, Max Power Dissipation=100mW, Min Operating Temperature=-55°C, Resistance=10, Resistor Type="Thick Film", Temperature Coefficient=100ppm/°C, Tolerance=1%, Case/Package=0603, Construction=Rectangular, Contact Plating=Tin, Depth=0.8mm, Features="Automotive AEC-Q200", Height=0.022inch, Length=1.55mm, Military Standard=Not, Mount="Surface Mount", Number of Terminations=2, Packaging="Tape and Reel", Power Rating=100mW, Radiation Hardening=No, RoHS Compliant=Yes, Series=RMCF, Width=0.031inch
R62 R63: library part RESISTOR_100K_0.5%_0603, "RES 100k OHM 0.5% 1/10W 0603", Digikey Part Numer=CR0603-JW-104ELFTR-ND, Supplier Part Number 1=311-2395-1-ND, Tolerance="+/- 0.5%", Value  (Ohms)=100K, ComponentLink1Description=Datasheet, ComponentLink1URL=https://www.bourns.com/docs/product-datasheets/CRxxxxx.pdf, Made By="John Ulm", Supplier=Digikey, Supplier 1=Digi-Key, Wattage=1/10W
R64: library part RESISTOR_10K_0603, "RES 10k OHM 5% 1/10W 0603", Digikey Part Numer=CR0603-JW-104ELFTR-ND, Supplier Part Number 1=2019-RK73B1JTTD103JCT-ND, Tolerance="+/- 5%", Value  (Ohms)=10K, ComponentLink1Description=Datasheet, ComponentLink1URL=https://www.bourns.com/docs/product-datasheets/CRxxxxx.pdf, Made By="Robert Pafford", Supplier=Digikey, Supplier 1=Digi-Key, Wattage=1/8W
SB1: library part JUMPER_0_0603, "0 Ohm Jumper No Fit for Solder Bridge", Value  (Ohms)=0, ComponentLink1Description=Digikey, ComponentLink1URL=https://www.digikey.com/en/products/detail/koa-speer-electronics-inc/RK73B1JTTD101J/9844701, Made By="Robert Pafford"
SB2: "JUMPER 0OHM 1206"
TP1 TP2 TP3 TP4 TP5 TP6: library part TESTPOINT, Made By="Robert Pafford"
U1 U2 U3 U4: library part CMP-0018-00600-2, "250 MHz, Rail-to-Rail I/O, CMOS Dual Operational Amplifier, 2.7 to 5.5 V, -40 to 125 degC, 8-pin SOP (DGK8), Green (RoHS & no Sb/Br)", Manufacturer="Texas Instruments", 2nd Harmonic(dBc)=75, 3rd Harmonic(dBc)=83, @ MHz=1, Acl, min stable gain(V/V)=1, BW @ Acl(MHz)=250, Code_JEDEC=MO-187, ComponentLink1Description="Manufacturer URL", ComponentLink1URL=http://www.ti.com/, ComponentLink2Description=Datasheet, ComponentLink2URL=http://www.ti.com/general/docs/lit/getliterature.tsp?genericPartNumber=OPA2354&fileType=pdf, ComponentLink3Description="Package Specification", ComponentLink3URL=http://www.ti.com/litv/pdf/mpds028d, DatasheetVersion=SBOS233E, Diff Gain(%)=0.02, Diff Phase(deg)=0.09, Eco-Plan="Green (RoHS & no Sb/Br)", Iib(Max)(nA)=0.05, Io(Typ)(mA)=100, Iq per channel(Max)(mA)=7.5, Mounting Technology="Surface Mount", Number of Channels=2, PackageDescription="8-Pin Thin Small Outline, Body 3 x 3 mm, Pitch 0.65 mm", PackageReference=DGK0008A, PackageVersion="4073329/E, 05/2006", PartNumber=OPA2354AIDGKR, Rail-Rail="In, Out", Settling Time (0.1%)(Typ)(ns)=30, Slew Rate(Typ)(V/us)=150, Sub Family="High Output Current Amplifier (>=50mA), High Speed Amplifier (>=50MHz), Low Supply Voltage Amplifier (<=2.7V)", THD (Fc is 1 MHz)(Typ)(dB)=-73, Vio(Max)(mV)=8, Vn at Flatband(Typ)(nV/rtHz)=6.5, Vs(Max)(V)=5.5, Vs(Min)(V)=2.7
U5: library part TJA1442AT, "CAN Interface IC High-Speed CAN Transceiver with Standby Mode", Supplier Part Number 1=771-TJA1442AT/0Z, Made By="Robert Pafford", Max Data Rate=5Mbps, Supplier 1=Mouser
U6 U7: "12 Bit, 1 MSPS, Dual, Simultaneous Sampling Single Ended / Pseudo-Differential SAR ADC 16-WQFN -40 to 125", Manufacturer=TI, Supplier Part Number 1=296-38482-1-ND, Created By="John Ulm", Max Sampling="1 MSpS", Supplier 1=DigiKey
U8: "Linear Voltage Regulator IC Positive Fixed 1 Output 1A DPAK"
U9: "Series Voltage Reference IC Fixed 2.5V V ±0.4% 5 mA SOT-23-3", Supplier Part Number 1=MAX6102EUR+TCT-ND, Supplier 1=DigiKey
U10: library part CMP-0323-00318-3, "Buck Step Down Regulator with 3 to 17 V Input and 5 V Output, -40 to 85 degC, 8-Pin WSON (DSG), Green (RoHS & no Sb/Br)", Manufacturer="Texas Instruments", Rating=Catalog, Switch Current Limit(Typ)(A)=1.8, Code_JEDEC=MO-229, ComponentLink1Description=Datasheet, ComponentLink1URL=http://www.ti.com/general/docs/lit/getliterature.tsp?genericPartNumber=TPS62163&fileType=pdf, ComponentLink2Description="Package Specification", ComponentLink2URL=http://www.ti.com/litv/pdf/mpds308a, ComponentLink3Description="URL Link1", ComponentLink3URL="Samples URL:http://www.ti.com/product/tps62163#samples", DatasheetVersion=SLVSAM2A, Duty Cycle(Max)(%)=100, Eco-Plan="Green (RoHS & no Sb/Br)", Iout(Max)(A)=1, Iq(Typ)(mA)=0.017, Mounting Technology="Surface Mount", PackageDescription="8-Pin Plastic Small Outline No-Lead, 2 x 2 x 0.8 mm Body, 0.5 mm Pitch, Exposed Pad", PackageReference=DSG0008A, PackageVersion="revB, Oct-2010", PartNumber=TPS62163DSGR, Preset Vout(V)=5, Regulated Outputs(#)=1, SubFamily="Step-Down Regulator", Synchronous Rectification=TRUE, Topology=Buck, Vin(Max)(V)=17, Vin(Min)(V)=3, Vout(Max)(V)=5, Vout(Min)(V)=5

## Via types
v1: diameter 25, hole 12, Top Layer to Bottom Layer, tented both sides, 78 vias
v2: diameter 30, hole 12, Top Layer to Bottom Layer, tented both sides, 23 vias
v3: diameter 26, hole 13, Top Layer to Bottom Layer, tented both sides, 4 vias
v4: diameter 23, hole 12, Top Layer to Bottom Layer, 2 vias

## Nets (pads, with @x,y where several pads share a name; then routed paths per layer and width w, separated by ;. In a path a pad name is that pad's centre, name@x,y a point inside that pad or via, vN(x,y) a via of type N, cw(c..) or ccw(c..) an arc to the next point about the centre after c; other vN are vias at no path point)
3V3: C19.1 C27.2 C29.2 J12.4 U5.5 U6.7 U7.7 | length 6649.7
  Top Layer w9.02: U5.5 2638.22,2920 2652.87,2934.66 C19.1 2654.67,2986.8 2654.67,3010.35 2665,3020.68 v1(2665,3025) ; U6.7 3509.84,1958.16 3524,1944 3536,1944 3585,1895 C27.2 3595.49,1879.51 3595.49,1854.51 v1(3600,1850) ; U7.7 3511.34,1228.16 3525.5,1214 3537.5,1214 3586.5,1165 C29.2 3596.98,1149.51 3596.98,1124.51 v1(3601.5,1120)
  Bottom Layer w9.02: v1(2665,3025) 3780,3025 4125,2680 4125,2180 3875,1930 3875,1675 ; J12.4 2918,537 2995,460 3935,460 4080,605 4080,1070 ; v1(3600,1850) 3601.89,1848.11 3601.89,1798.11 3725,1675 3875,1675 ; v1(3601.5,1120) 3635,1086.5 3635,1085 3650,1070 4080,1070 ; 3875,1675 3875,1345 4080,1140 4080,1070
5V_FPGA: J4.7
12V: C37.1 J5.3 J6.3 J7.2 SB2.2 U10.2 U10.3 | length 399.3
  Top Layer w60: J5.3 580,2548.35 580,2280
+2.5: C36.1 R16.2 R17.2 R58.2 R61.2 SB1.1 TP2.TP U9.2 | length 1733.7
  Top Layer w10: SB1.1 2193.5,692.5 2208.5,707.5 2211.86,707.5 2214.36,710 2303.7,710 ; TP2.TP@2291.85,698.15 2303.7,710 ; U9.2 C36.1@2367.5,717.5 ; R58.2 2383.7,791.3 v1(2384.35,790.65) 2384.35,786.59 2380,782.24 2380,730 C36.1 C36.1@2367.5,717.5 ; R61.2 2383.7,1191.3 v1(2384.35,1190.65) ; R17.2 2383.7,1591.3 v1(2384.35,1590.65) ; R16.2 2383.7,1991.3 v1(2384.35,1990.65) ; 2303.7,710 2360,710 C36.1@2367.5,717.5
  Bottom Layer w10: v1(2384.35,790.65) v1(2384.35,1190.65) v1(2384.35,1590.65) v1(2384.35,1990.65)
+5: C1.1 C3.1 C11.1 C12.1 C20.1 C28.2 C30.2 C31.1 C34.1 C35.1 C38.1 L1.1 R4.1 R5.1 R6.1 R7.1 R20.1 R21.1 R25.1 R26.1 R32.1 R33.1 R62.1 R64.1 R65.1 TP1.TP U1.8 U2.8 U3.8 U4.8 U5.3 U6.14 U7.14 U8.3 U9.1 U10.6 | length 2047.7
  Top Layer w9.02: R20.1 v1(2075,1010) ; R25.1 v1(2075,1410) ; R6.1 v1(2075,1810) ; R4.1 v1(2075,2210) ; v1(2330,1110) 2345,1095 C11.1 2345,1060 2375,1030 R21.1 ; v1(2330,1510) 2345,1495 C12.1 2345,1460 2375,1430 R26.1 ; v1(2330,1910) 2345,1895 C3.1 2345,1860 2375,1830 R7.1 ; v1(2330,2310) 2345,2295 C1.1 2345,2260 2375,2230 R5.1 ; U3.8 C11.1@2341.54,1061.54 ; U4.8 C12.1@2341.54,1461.54 ; U2.8 C3.1@2341.54,1861.54 ; U1.8 C1.1@2341.54,2261.54 ; U6.14 3509.84,2149.84 3555,2195 3575,2195 3585,2205 C28.2 ; U7.14 3511.34,1419.84 3556.5,1465 3576.5,1465 3586.5,1475 C30.2
  Top Layer w10: U10.6 787.24,810.16 797.13,800.27 797.13,792.87 v1(800,790) 799.35,789.35 799.35,730.65 R65.1@798.7,730 ; R64.1 1435,668.5 C34.1 ; C31.1 1970,521.5 R62.1 ; C20.1 2787.13,2906.14 2823.27,2870 U5.3 ; R32.1 v1(3282.6,2092.6) ; R33.1 v1(3284.09,1362.6) ; C28.2 C28.2@3585,2215 ; C30.2 C30.2@3586.5,1485
  Top Layer w20: C28.2@3585,2215 v1(3615,2245) ; C30.2@3586.5,1485 v1(3616.5,1515)
  Top Layer w25: U9.1 2443.5,645 C35.1
  other v1: 1970,563.25 2475,645 885.23,890.55 855.23,905.55 880.23,935.55 855.23,965.55 2787.13,2945.57
  other v2: 1300,760 1380,760 1340,800 1300,840 1380,840
Audio_CH1: C5.2 J8.1 R13.1 | length 725.2
  Top Layer w10: C5.2 1930,2250 2030,2350 2167.64,2350 2288.7,2471.06 R13.1 2288.7,2689.68 J8.1
Audio_CH2: C7.2 J9.1 R14.1 | length 1019
  Top Layer w10: C7.2 1925,1800 1915,1810 1915,1815 1800,1930 1800,2240 1963.7,2403.7 R14.1 1963.7,2693.66 J9.1
Audio_CH3: C15.2 J10.1 R19.1 | length 1415.9
  Top Layer w10: J10.1 1643.7,2693.66 R19.1 1750,2368.7 1750,1580 1915,1415 1915,1410 1925,1400 C15.2
Audio_CH4: C13.2 J11.1 R24.1 | length 1945.5
  Top Layer w10: J11.1 1323.7,2693.66 R24.1 1323.7,2471.06 1700,2094.76 1700,1400 1930,1170 C13.2
CAN_N: J5.2 J6.2 U5.6 | length 2731.9
  Top Layer w15: J6.2 369.29,2505.69 297.49,2577.49 285,2589.99 285,2674.76 J5.2 384.06,2759.05 481.78,2856.78 2544.39,2856.78 2557.62,2870 U5.6
CAN_P: J5.4 J6.4 U5.7 | length 2760.8
  Top Layer w15: J6.4 487.41,2413.81 303.54,2597.67 303.54,2652.32 351.65,2700.43 428.78,2700.43 491.77,2763.42 491.77,2806.01 524,2838.23 2544.39,2838.23 2562.63,2820 U5.7
CANRX: J2.12 U5.4 | length 376.3
  Top Layer w15: U5.4 2856.73,2920 2895,2881.73 2895,2664 J2.12
CANTX: J2.10 U5.1 | length 177.7
  Top Layer w15: U5.1 2844.52,2770 2848.5,2766.02 2848.5,2610.5 J2.10
CH1_SDO: J1.3 R39.1 | length 470.3
  Top Layer w10: J1.3 3416,2494 3490,2420 3540.94,2420 3755,2205.94 R39.1
CH2_SDO: J1.5 R43.1 | length 493.3
  Top Layer w10: J1.5 3518,2502 3795,2225 3795,2185.94 3755,2145.94 R43.1
CH3_SDO: J1.15 R44.1 | length 1197.5
  Top Layer w10: R44.1 3756.5,1415.94 3795,1454.44 3795,1860 4016,2081 J1.15
CH4_SDO: J1.13 R40.1 | length 1096.1
  Top Layer w10: R40.1 3756.5,1866.5 3916,2026 J1.13
CLK: J1.7 R47.1 R48.1 | length 1314.1
  Top Layer w10: R47.1@3752.5,2086 v2@3794,2086 ; R48.1 3757.5,1351 3799,1351 v2(3800,1350)
  Middle 2 Layer w10: J1.7 3795,2323 v2(3795,2085) 3797.5,2082.5 3797.5,1352.5 v2(3800,1350)
CS_1: J1.9 R49.1 | length 587.6
  Top Layer w10: J1.9 3835,2383 3835,2059 3798,2022 R49.1
CS_2: J1.16 R50.1 | length 1503
  Top Layer w10: R50.1 3812,1292 3850,1330 3850,1880 4080,2110 4080,2538 J1.16
Filter_CH1: C6.1 R5.2 R11.1 R37.2 TP3.TP | length 1218.2
  Top Layer w10: R11.1 2448.05,2299.35 2448.05,2230.65 R5.2 2525,2230 2535,2240 2535,2245 2680,2390 3463.62,2390 3505.08,2348.54 R37.2
Filter_CH2: C8.1 R7.2 R15.1 R41.1 TP4.TP | length 1200.4
  Top Layer w10: R15.1 2448.05,1899.35 2448.05,1830.65 R7.2 C8.1 2525,1830 2635,1720 3483.62,1720 3515.08,1751.46 R41.1
Filter_CH3: C16.1 R26.2 R38.2 R60.1 TP6.TP | length 1247.5
  Top Layer w10: R60.1 2448.05,1499.35 2448.05,1430.65 R26.2 C16.1 2525,1430 2745,1650 TP6.TP 3485.12,1650 3516.57,1618.54 R38.2
Filter_CH4: C14.1 R21.2 R42.1 R57.1 TP5.TP | length 1171.2
  Top Layer w10: R57.1 2448.05,1099.35 2448.05,1030.65 R21.2 C14.1 2955,1030 3005,980 3465.12,980 3506.57,1021.46 R42.1
GND: C1.2 C2.1 C3.2 C4.1 C9.1 C9.2 C10.1 C10.2 C11.2 C12.2 C17.1 C17.2 C18.1 C18.2 C19.2 C20.2 C21.1 C22.1 C27.1 C28.1 C29.1 C30.1 C32.2 C33.1 C34.2 C35.2 C36.2 C37.2 C38.2 D1.2 J4.3 J4.5 J5.1 J6.1 J7.1 J8.2 J9.2 J10.2 J11.2 R10.2 R11.2 R12.2 R13.2 R14.2 R15.2 R19.2 R24.2 R28.2 R29.2 R51.2 R52.2 R53.2 R54.2 R57.2 R59.2 R60.2 R63.2 U1.4 U2.4 U3.4 U4.4 U5.2 U6.2 U6.3 U6.13 U6.17 U7.2 U7.3 U7.13 U7.17 U8.2 U9.3 U10.1 U10.4 U10.5 U10.9 | length 3031.1
  Top Layer w9.02: v1(3380,2050) v1@3384.06,2050 ; v1(3381.5,1320) v1@3385.56,1320 ; U6.3 3393.9,2040.16 v1@3384.06,2050 ; U6.2 3393.9,2059.84 v1@3384.06,2050 ; U7.3 3395.4,1310.16 v1@3385.56,1320 ; U7.2 3395.4,1329.84 v1@3385.56,1320 ; U6.13 3529.53,2131.79 3576.8,2131.8 3639.51,2194.51 3644.51,2194.51 3655,2205 C28.1 ; U7.13 U7.13@3531.02,1401.79 ; U7.13@3531.04,1401.8 3578.3,1401.8 3641.01,1464.51 3646.01,1464.51 3656.5,1475 C30.1
  Top Layer w10: R28.2 v1(2005,1010) ; R59.2 v1(2005,1410) ; R12.2 v1(2005,1810) ; R10.2 v1(2005,2210) ; U3.4 2148.86,901.61 2145,897.76 C17.1 2155,820 2155,800 v1(2165,790) ; U4.4 2148.86,1301.61 2145,1297.76 C18.1 2155,1220 2155,1200 v1(2165,1190) ; U2.4 2148.86,1701.61 2145,1697.76 C10.1 2155,1620 2155,1600 v1(2165,1590) ; U1.4 2148.86,2101.61 2145,2097.76 C9.1 2155,2020 2155,2000 v1(2165,1990) ; v1(2200,790) 2205,795 2205,820 C17.2 ; v1(2200,1190) 2205,1195 2205,1220 C18.2 ; v1(2200,1590) 2205,1595 2205,1620 C10.2 ; v1(2200,1990) 2205,1995 2205,2020 C9.2 ; C11.2 2275,1095 v1(2290,1110) ; C12.2 2275,1495 v1(2290,1510) ; C3.2 2275,1895 v1(2290,1910) ; C1.2 2275,2295 v1(2290,2310) ; R57.2 v1(2410,1145) ; R60.2 v1(2410,1545) ; R15.2 v1(2410,1945) ; R11.2 v1(2410,2345) ; v1(2480,2770) R29.2 ; C19.2 C20.2 ; v1(2780,2820) U5.2 ; v1(3290,2300) 3291.3,2301.3 R52.2 ; v1@3298.5,1208.5 v1@3300,1210 ; C4.1 v1(3298.5,1938.5) v1@3300,1940 ; C2.1 3300,2208.5 v1(3300,2160) ; C22.1 v1(3300,1208.5) v1@3301.5,1210 ; C21.1 3301.5,1478.5 v1(3301.5,1430) ; v1(3301.5,1570) 3302.8,1571.3 R54.2 ; v1(3310,1070) R53.2@3350,1070 ; v1(3310,1800) R51.2 ; v1(3640,1850) 3640,1854.06 3645,1859.06 3645,1875 3655,1885 C27.1 ; v1(3641.5,1120) 3641.5,1124.06 3646.5,1129.06 3646.5,1145 3656.5,1155 C29.1
  Top Layer w15: R24.2@1286.3,2475.35 v3@1286.3,2518.7 ; R19.2@1606.3,2475.35 v3@1606.3,2518.7 ; R14.2@1926.3,2475.35 v3@1926.3,2518.7 ; R13.2@2251.3,2475.35 v3@2251.3,2518.7
  Top Layer w20: v2(1360,460) D1.2 ; R63.2 2189.25,520.75 2189.25,604.25 C32.2 ; U9.3 2405,574 2406,575 C35.2 ; v1(3649.45,2245) 3650.41,2244.04 3650.41,2214.59 C28.1 ; v1(3650.94,1515) 3651.9,1514.04 3651.9,1484.59 C30.1
  other v1: 2189.25,562.5 2458.13,575.04 2435,792.03 1220,980 3481.5,1300 3521.5,1300 3481.5,1340 3521.5,1340 3480,2030 3520,2030 3480,2070 3520,2070 2720,2985
  other v2: 1560,760 1640,760 1720,760 650,775 1600,800 1680,800 1760,800 1560,840 1640,840 1720,840 1600,880 1680,880 1760,880 755,930
  other v3: 1285.65,2519.35 1605.65,2519.35 1925.65,2519.35 2250.65,2519.35
  other v4: 725,804.25 725,835.75
NetC2_2: C2.2 R30.2 | length 86.8
  Top Layer w9.02: C2.2 3370,2201.5 R30.2
NetC4_2: C4.2 R3.2 | length 86.8
  Top Layer w9.02: C4.2 3370,1898.5 R3.2
NetC5_1: C5.1 R4.2 R10.1 U1.3 | length 229.6
  Top Layer w10: C5.1 1932.8,2127.2 U1.3
NetC6_2: C6.2 R1.2 U1.7 | length 181.4
  Top Layer w9.02: U1.7 2344.49,2155.75 2437.05,2155.75 R1.2 2518.7,2158.7 C6.2
NetC7_1: C7.1 R6.2 R12.1 U2.3 | length 229.6
  Top Layer w10: C7.1 1932.8,1727.2 U2.3
NetC8_2: C8.2 R2.2 U2.7 | length 181.4
  Top Layer w9.02: U2.7 2344.49,1755.75 2437.05,1755.75 R2.2 2518.7,1758.7 C8.2
NetC13_1: C13.1 R20.2 R28.1 U3.3 | length 229.6
  Top Layer w10: C13.1 1932.8,927.2 U3.3
NetC14_2: C14.2 R18.2 U3.7 | length 181.4
  Top Layer w9.02: U3.7 2344.49,955.75 2437.05,955.75 R18.2 2518.7,958.7 C14.2
NetC15_1: C15.1 R25.2 R59.1 U4.3 | length 229.6
  Top Layer w10: C15.1 1932.8,1327.2 U4.3
NetC16_2: C16.2 R23.2 U4.7 | length 181.4
  Top Layer w9.02: U4.7 2344.49,1355.75 2437.05,1355.75 R23.2 2518.7,1358.7 C16.2
NetC21_2: C21.2 R55.2 | length 86.8
  Top Layer w9.02: C21.2 3371.5,1471.5 R55.2
NetC22_2: C22.2 R56.2 | length 86.8
  Top Layer w9.02: C22.2 3371.5,1168.5 R56.2
NetC23_1: C23.1 R31.1 U6.16 | length 210.3
  Top Layer w9.02: R31.1@3427.43,2285.48 R31.1 3420,2227.43 C23.1 3437.43,2205.98 3470.47,2172.94 U6.16
NetC23_2: C23.2 R37.1 U6.15 | length 185.6
  Top Layer w9.02: U6.15 3490.16,2197.59 C23.2 3502.57,2284.02 R37.1
NetC24_1: C24.1 R34.1 U7.16 | length 195.6
  Top Layer w9.02: R34.1 3438.93,1555.48 C24.1 3438.93,1475.98 3471.97,1442.94 U7.16
NetC24_2: C24.2 R38.1 U7.15 | length 189.7
  Top Layer w9.02: U7.15 3491.65,1467.59 C24.2 3521.5,1497.43 R38.1
NetC25_1: C25.1 R35.2 U6.5 | length 194.2
  Top Layer w9.02: R35.2 3430,1882.57 C25.1 3437.43,1934.67 3470.47,1967.71 U6.5
NetC25_2: C25.2 R41.2 U6.6 | length 189.7
  Top Layer w9.02: U6.6 3490.16,1946.21 3502.57,1933.8 C25.2 3520,1872.57 R41.2
NetC26_1: C26.1 R36.2 U7.5 | length 198.3
  Top Layer w9.02: R36.2 3421.5,1142.57 C26.1 3438.93,1204.67 3471.97,1237.71 U7.5
NetC26_2: C26.2 R42.2 U7.6 | length 185.6
  Top Layer w9.02: U7.6 3491.65,1216.21 3504.06,1203.8 C26.2
  Top Layer w10: C26.2 3511.5,1152.57 R42.2
NetC31_2: C31.2 C32.1 R62.2 R63.1 SB1.2 | length 341.9
  Top Layer w10: C31.2 2040,521.5 R62.2 R63.1 2121.5,603.5 C32.1 2120,683.5 SB1.2
NetC33_2: C33.2 SB2.1 U8.1
NetD1_1: D1.1 R64.2 | length 206.4
  Top Layer w10: D1.1 1498.5,463.5 R64.2
NetJ1_1: J1.1
NetJ1_2: J1.2
NetJ1_4: J1.4
NetJ1_6: J1.6
NetJ1_8: J1.8
NetJ1_10: J1.10
NetJ1_12: J1.12
NetJ2_1: J2.1
NetJ2_2: J2.2
NetJ2_3: J2.3
NetJ2_4: J2.4
NetJ2_5: J2.5
NetJ2_6: J2.6
NetJ2_7: J2.7
NetJ2_8: J2.8
NetJ2_9: J2.9
NetJ2_11: J2.11
NetJ2_13: J2.13
NetJ2_14: J2.14
NetJ2_15: J2.15
NetJ2_16: J2.16
NetJ3_1: J3.1
NetJ3_2: J3.2
NetJ3_3: J3.3
NetJ3_4: J3.4
NetJ3_5: J3.5
NetJ3_6: J3.6
NetJ3_7: J3.7
NetJ3_8: J3.8
NetJ3_9: J3.9
NetJ3_10: J3.10
NetJ3_11: J3.11
NetJ3_12: J3.12
NetJ4_1: J4.1
NetJ4_2: J4.2
NetJ4_4: J4.4
NetJ4_6: J4.6
NetJ4_8: J4.8
NetJ12_1: J12.1
NetJ12_2: J12.2
NetJ12_3: J12.3
NetL1_2: L1.2 U10.7
NetR1_1: R1.1 R8.1 U1.6 | length 320.2
  Top Layer w9.02: R8.1 2208.7,2206.3 2287.8,2127.2 U1.6 2344.49,2124.25 2437.05,2124.25 R1.1
NetR2_1: R2.1 R9.1 U2.6 | length 320.2
  Top Layer w9.02: R9.1 2208.7,1806.3 2287.8,1727.2 U2.6 2344.49,1724.25 2437.05,1724.25 R2.1
NetR3_1: R3.1 R30.1 R32.2 U6.1 U6.4 | length 284
  Top Layer w9.02: R3.1 R3.1@3370,2007.72 ; R30.1 R30.1@3370,2092.28 ; U6.4 3382.76,2020.47 R3.1@3370,2007.72 ; U6.1 3383.74,2079.53 3377.8,2085.47 3376.81,2085.47 R30.1@3370,2092.28 ; R3.1@3370,2007.72 3363.19,2014.53 3351.54,2014.53 3320,2046.06 R32.2 3320,2053.94 3351.54,2085.47 3363.19,2085.47 R30.1@3370,2092.28
NetR8_2: R8.2 U1.1 U1.2 | length 117.5
  Top Layer w9.02: U1.2 U1.1 2166.95,2178.39 2171.3,2182.73 R8.2
NetR9_2: R9.2 U2.1 U2.2 | length 117.5
  Top Layer w9.02: U2.2 U2.1 2166.95,1778.39 2171.3,1782.73 R9.2
NetR16_1: R16.1 U1.5 | length 68.8
  Top Layer w9.02: U1.5 2341.95,2101.61 2346.3,2097.27 R16.1
NetR17_1: R17.1 U2.5 | length 68.8
  Top Layer w9.02: U2.5 2341.95,1701.61 2346.3,1697.27 R17.1
NetR18_1: R18.1 R22.1 U3.6 | length 320.2
  Top Layer w9.02: R22.1 2208.7,1006.3 2287.8,927.2 U3.6 2344.49,924.25 2437.05,924.25 R18.1
NetR22_2: R22.2 U3.1 U3.2 | length 117.5
  Top Layer w9.02: U3.2 U3.1 2166.95,978.39 2171.3,982.73 R22.2
NetR23_1: R23.1 R27.1 U4.6 | length 320.2
  Top Layer w9.02: R27.1 2208.7,1406.3 2287.8,1327.2 U4.6 2344.49,1324.25 2437.05,1324.25 R23.1
NetR27_2: R27.2 U4.1 U4.2 | length 117.5
  Top Layer w9.02: U4.2 U4.1 2166.95,1378.39 2171.3,1382.73 R27.2
NetR29_1: R29.1 U5.8 | length 73
  Top Layer w15: R29.1 U5.8
NetR31_2: R31.2 R52.1 | length 84.7
  Top Layer w9.02: R52.1 3345.65,2344.35 3406.8,2344.35 3412.45,2350 R31.2
NetR33_2: R33.2 R55.1 R56.1 U7.1 U7.4 | length 284
  Top Layer w9.02: R56.1 R56.1@3371.5,1277.72 ; R55.1 R55.1@3371.5,1362.28 ; U7.4 3384.25,1290.47 R56.1@3371.5,1277.72 ; U7.1 3385.24,1349.53 3379.29,1355.47 3378.31,1355.47 R55.1@3371.5,1362.28 ; R56.1@3371.5,1277.72 3364.69,1284.53 3353.03,1284.53 3321.5,1316.06 R33.2 3321.5,1323.94 3353.03,1355.47 3364.69,1355.47 R55.1@3371.5,1362.28
NetR34_2: R34.2 R54.1 | length 84.7
  Top Layer w9.02: R54.1 3355.43,1608.7 3366.73,1620 R34.2
NetR35_1: R35.1 R51.1 | length 84.6
  Top Layer w9.02: R51.1 3353.94,1762.6 3365.08,1751.46 R35.1
NetR36_1: R36.1 R53.1 | length 84.1
  Top Layer w10: R53.1 3345.43,1031.3 3355.28,1021.46 R36.1
NetR39_2: R39.2 U6.12 | length 206.6
  Top Layer w9.02: U6.12 3599.06,2079.53 3717.6,2198.06 R39.2
NetR40_2: R40.2 U7.12 | length 206.6
  Top Layer w9.02: U7.12 3600.56,1349.53 3719.09,1468.06 R40.2
NetR43_2: R43.2 U6.11 | length 189.9
  Top Layer w9.02: U6.11 3639.38,2059.84 3717.6,2138.06 R43.2
NetR44_2: R44.2 U7.11 | length 189.9
  Top Layer w9.02: U7.11 3640.87,1329.84 3719.09,1408.06 R44.2
NetR45_1: R45.1 U6.8 | length 200.3
  Top Layer w9.02: U6.8 3693.67,1985.93 3707.35,1972.25 3711.28,1972.25 3717.6,1965.94 R45.1
NetR46_1: R46.1 U7.8 | length 200.3
  Top Layer w9.02: U7.8 3695.17,1255.93 3708.84,1242.25 3712.78,1242.25 3719.09,1235.94 R46.1
NetR47_2: R47.2 U6.10 | length 173.2
  Top Layer w9.02: U6.10 3679.69,2040.16 3717.6,2078.06 R47.2
NetR48_2: R48.2 U7.10 | length 173.2
  Top Layer w9.02: U7.10 3681.19,1310.16 3719.09,1348.06 R48.2
NetR49_2: R49.2 U6.9 | length 154.2
  Top Layer w9.02: U6.9 3716.07,2020.47 R49.2
NetR50_2: R50.2 U7.9 | length 154.2
  Top Layer w9.02: U7.9 3717.57,1290.47 R50.2
NetR58_1: R58.1 U3.5 | length 68.8
  Top Layer w9.02: U3.5 2341.95,901.61 2346.3,897.27 R58.1
NetR61_1: R61.1 U4.5 | length 68.8
  Top Layer w9.02: U4.5 2341.95,1301.61 2346.3,1297.27 R61.1
NetR65_2: R65.2 U10.8 | length 192.7
  Top Layer w10: v1(760,750) 760.65,749.35 760.65,720.65 R65.2 ; v1(760,885) 761.2,883.8 761.2,849.61 761.28,849.53 U10.8
  Bottom Layer w10: v1@760,760 v1(760,885)
SDI_1: J1.11 R45.2 | length 631
  Top Layer w10: R45.2 3798,1962 3865,2029 3865,2453 J1.11
SDI_2: J1.14 R46.2 | length 1843.8
  Top Layer w10: R46.2 v2@3798,1232
  Middle 2 Layer w10: v2(3799,1231) 3855,1287 3855,2165 4080,2390 4080,2670 4045,2705 3975,2705 3918.5,2648.5 3918.5,2604.5 J1.14
pads on no net: J5.5 J6.5 J7.3

## Polygon pours and split planes (outlines as drawn)
+5 on Top Layer "NONET_L-01_P-001" (solid, remove dead copper, pour order 14): 795,990 1030,990 1030,880 1025,875 790,875 790,985
12V on Top Layer "NONET_L-01_P-001" (solid, remove dead copper, pour order 13): 1155,1305 1155,1000 850,1000
GND on Top Layer "NONET_L-01_P-001" (solid, remove dead copper, pour order 12): 550,805 743.62,805 745.26,803.36 740,798.11 740,730 550,730
GND on Top Layer "NONET_L-01_P-001" (solid, remove dead copper, pour order 11): 675,990 785,990 785,775 675,775
NetL1_2 on Top Layer "NONET_L-01_P-001" (solid, remove dead copper, pour order 10): 750,820 750,845 1025.1,845 1030.5,839.6 1030,839.1 1030,760 860,760 800,820
12V on Top Layer "NONET_L-01_P-001" (solid, remove dead copper, pour order 9): 615,825 640,800 700,800 700,840 665,840 665,1050.83 470,1040 520,990 520,825
+5 on Top Layer "NONET_L-01_P-001" (solid, remove dead copper, pour order 8): 1190,920 1460,920 1460,740 1190,740